# Altium PCB M3 ICE.PcbDoc (part 1 of 2)
Units mil, origin at the board's own origin, x right, y up, seen from the top; angles counter-clockwise.
Board outline 4160 x 4350 mil, 4 copper layers (Top Layer, Mid-Layer 1, Mid-Layer 2, Bottom Layer); 218 components, 222 nets, 884 pads, 88 vias.
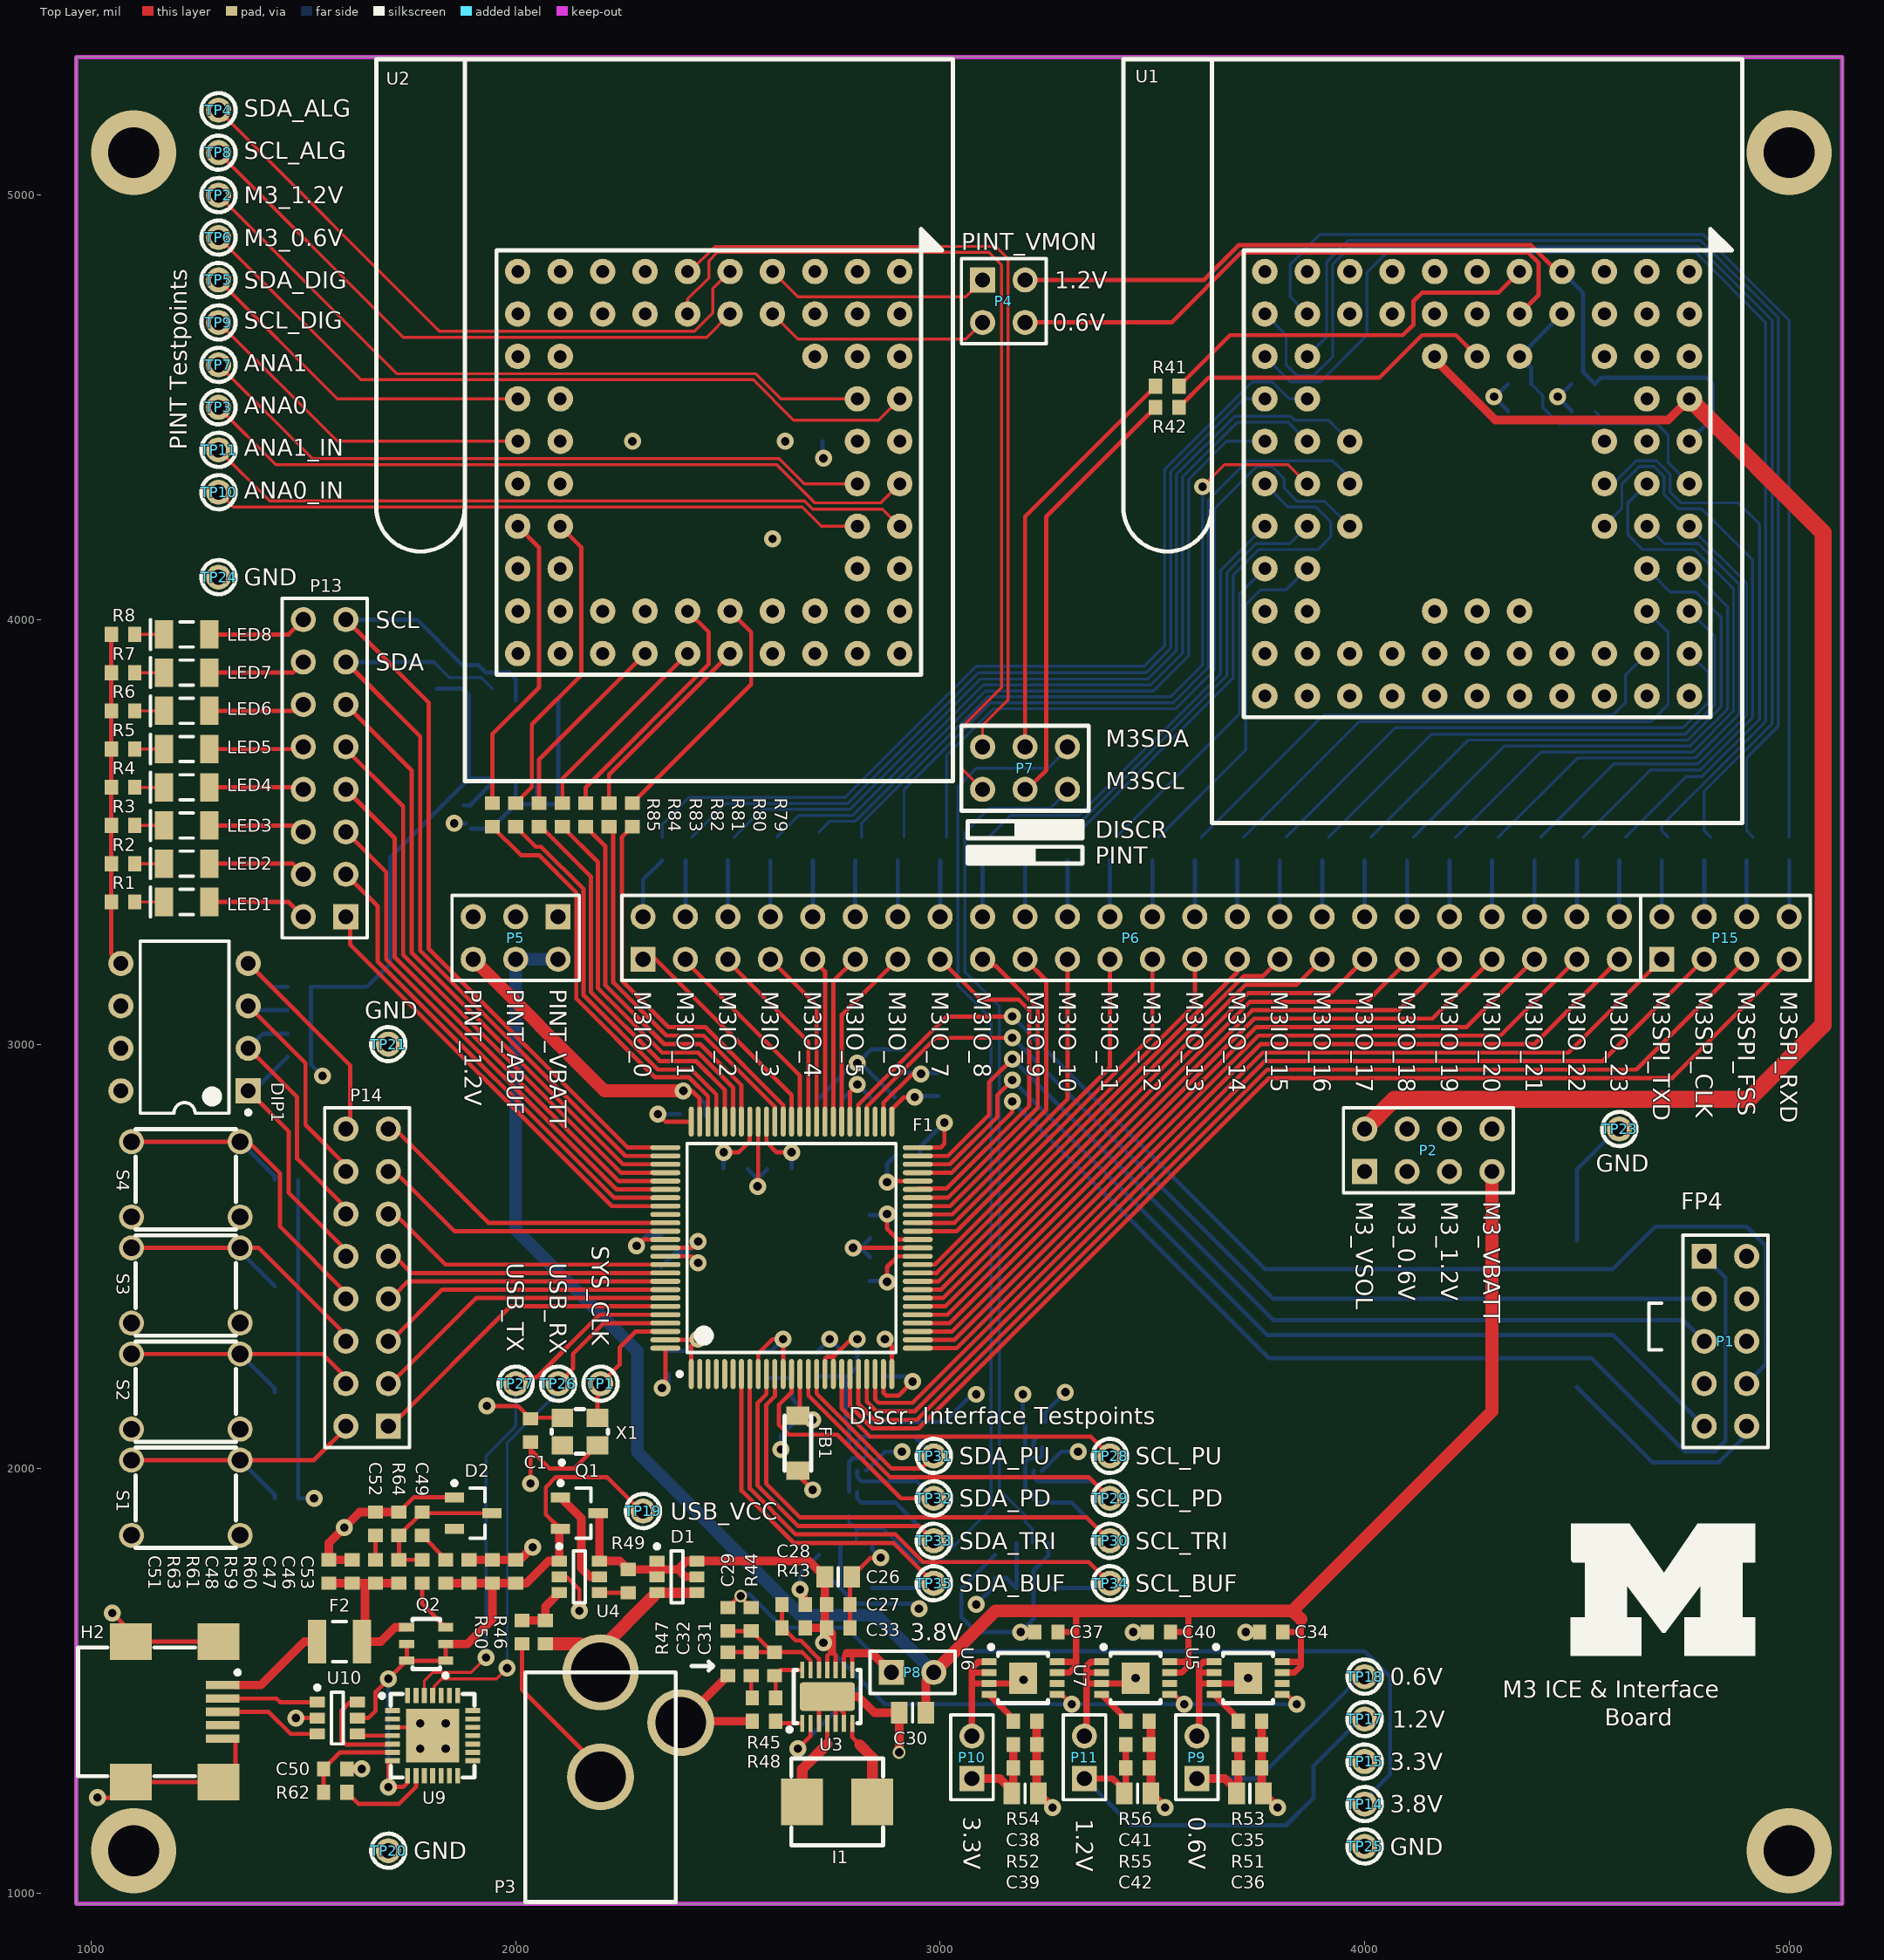
[diagram p0: Top Layer view]
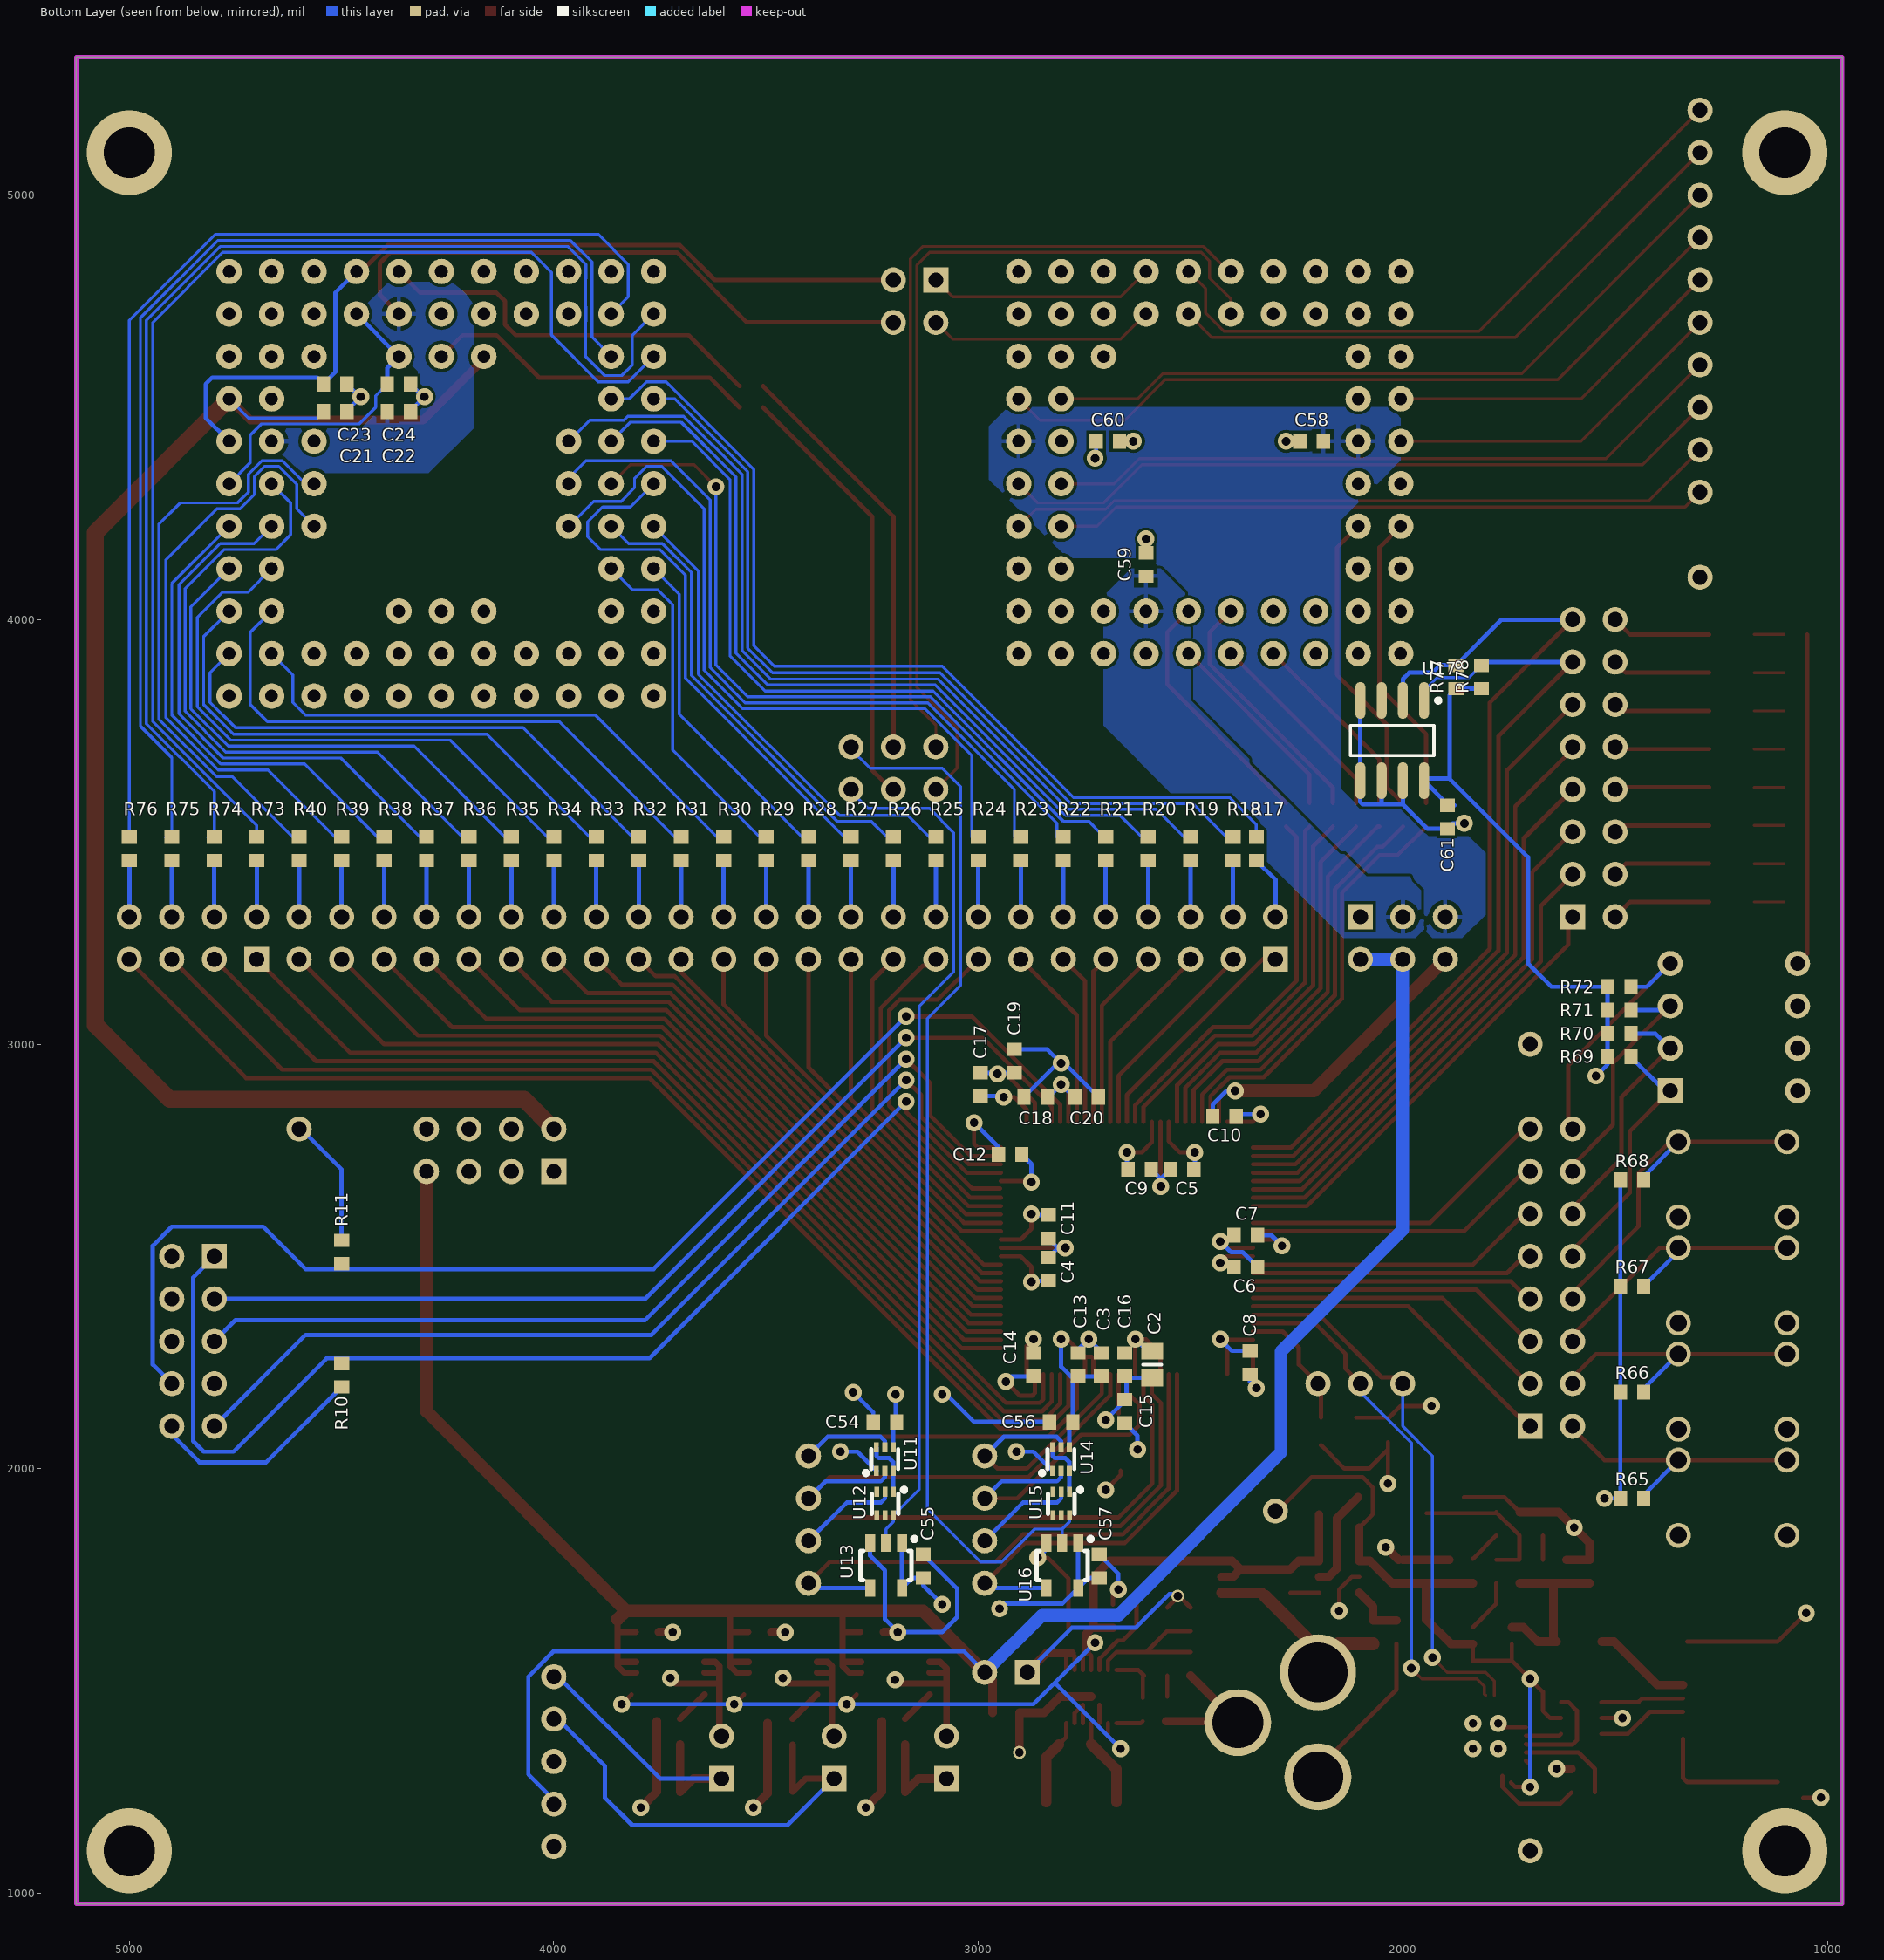
[diagram p1: Bottom Layer view, seen from below]
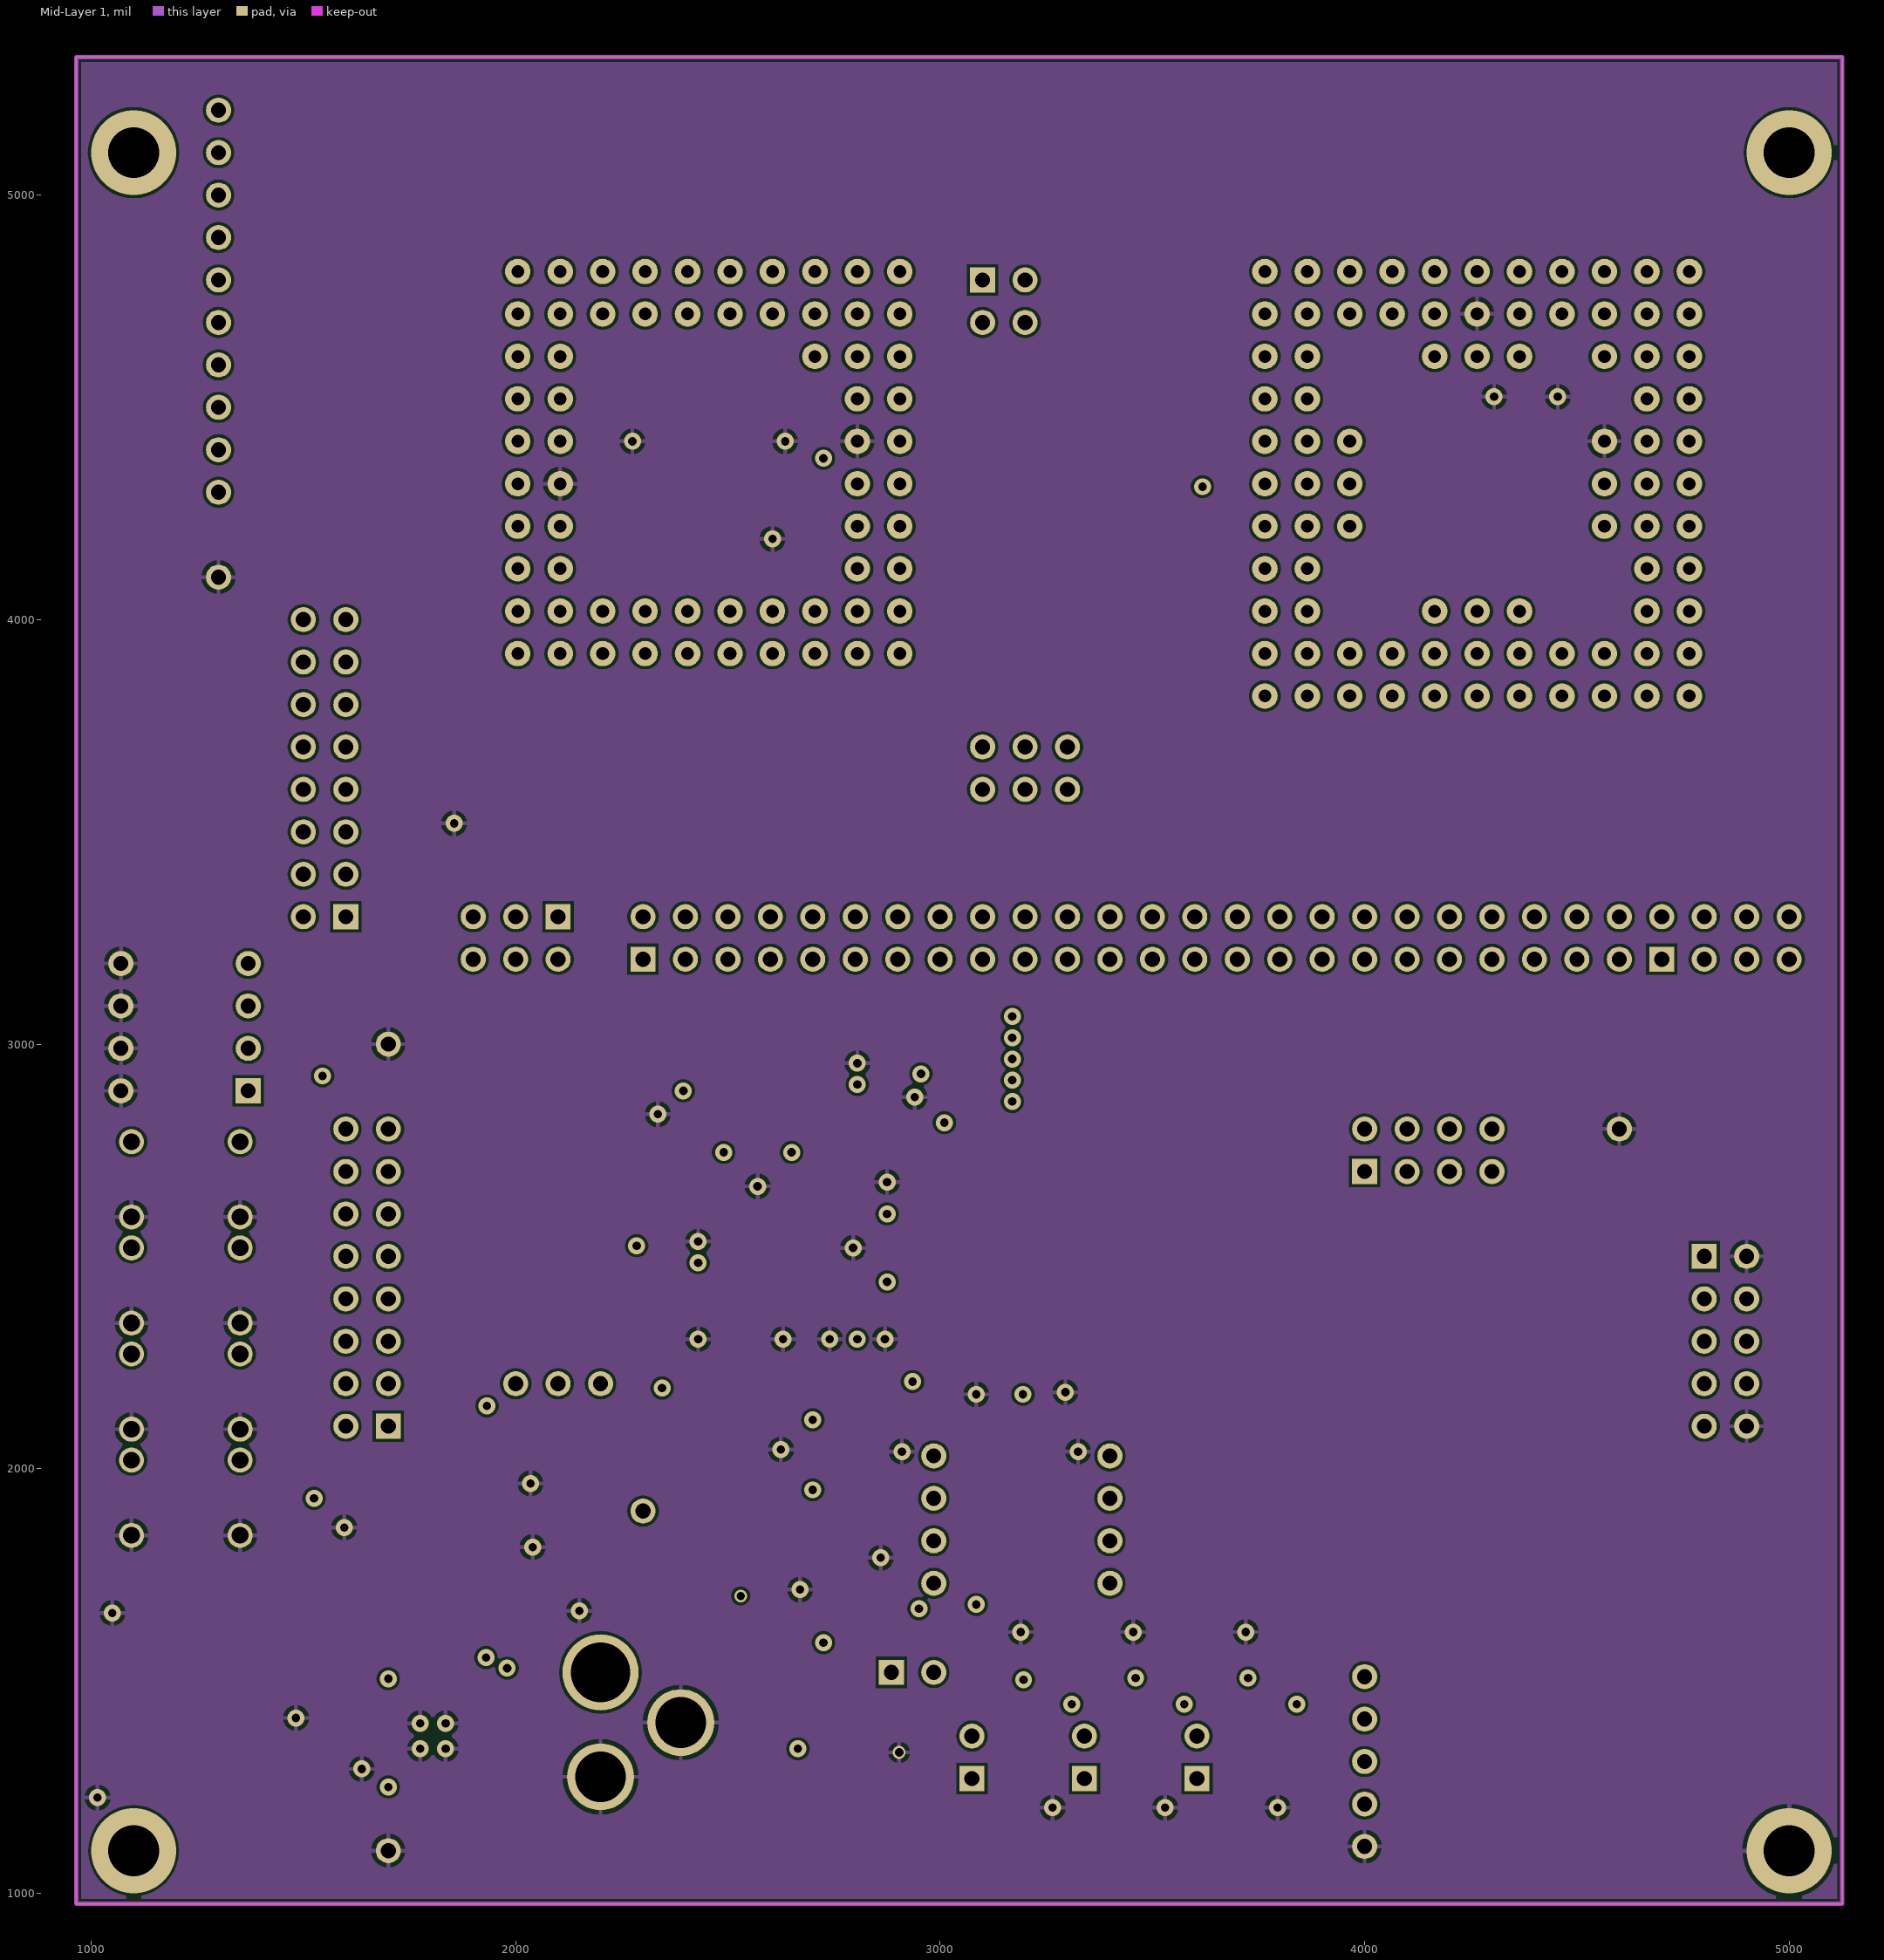
[diagram p2: Mid-Layer 1]
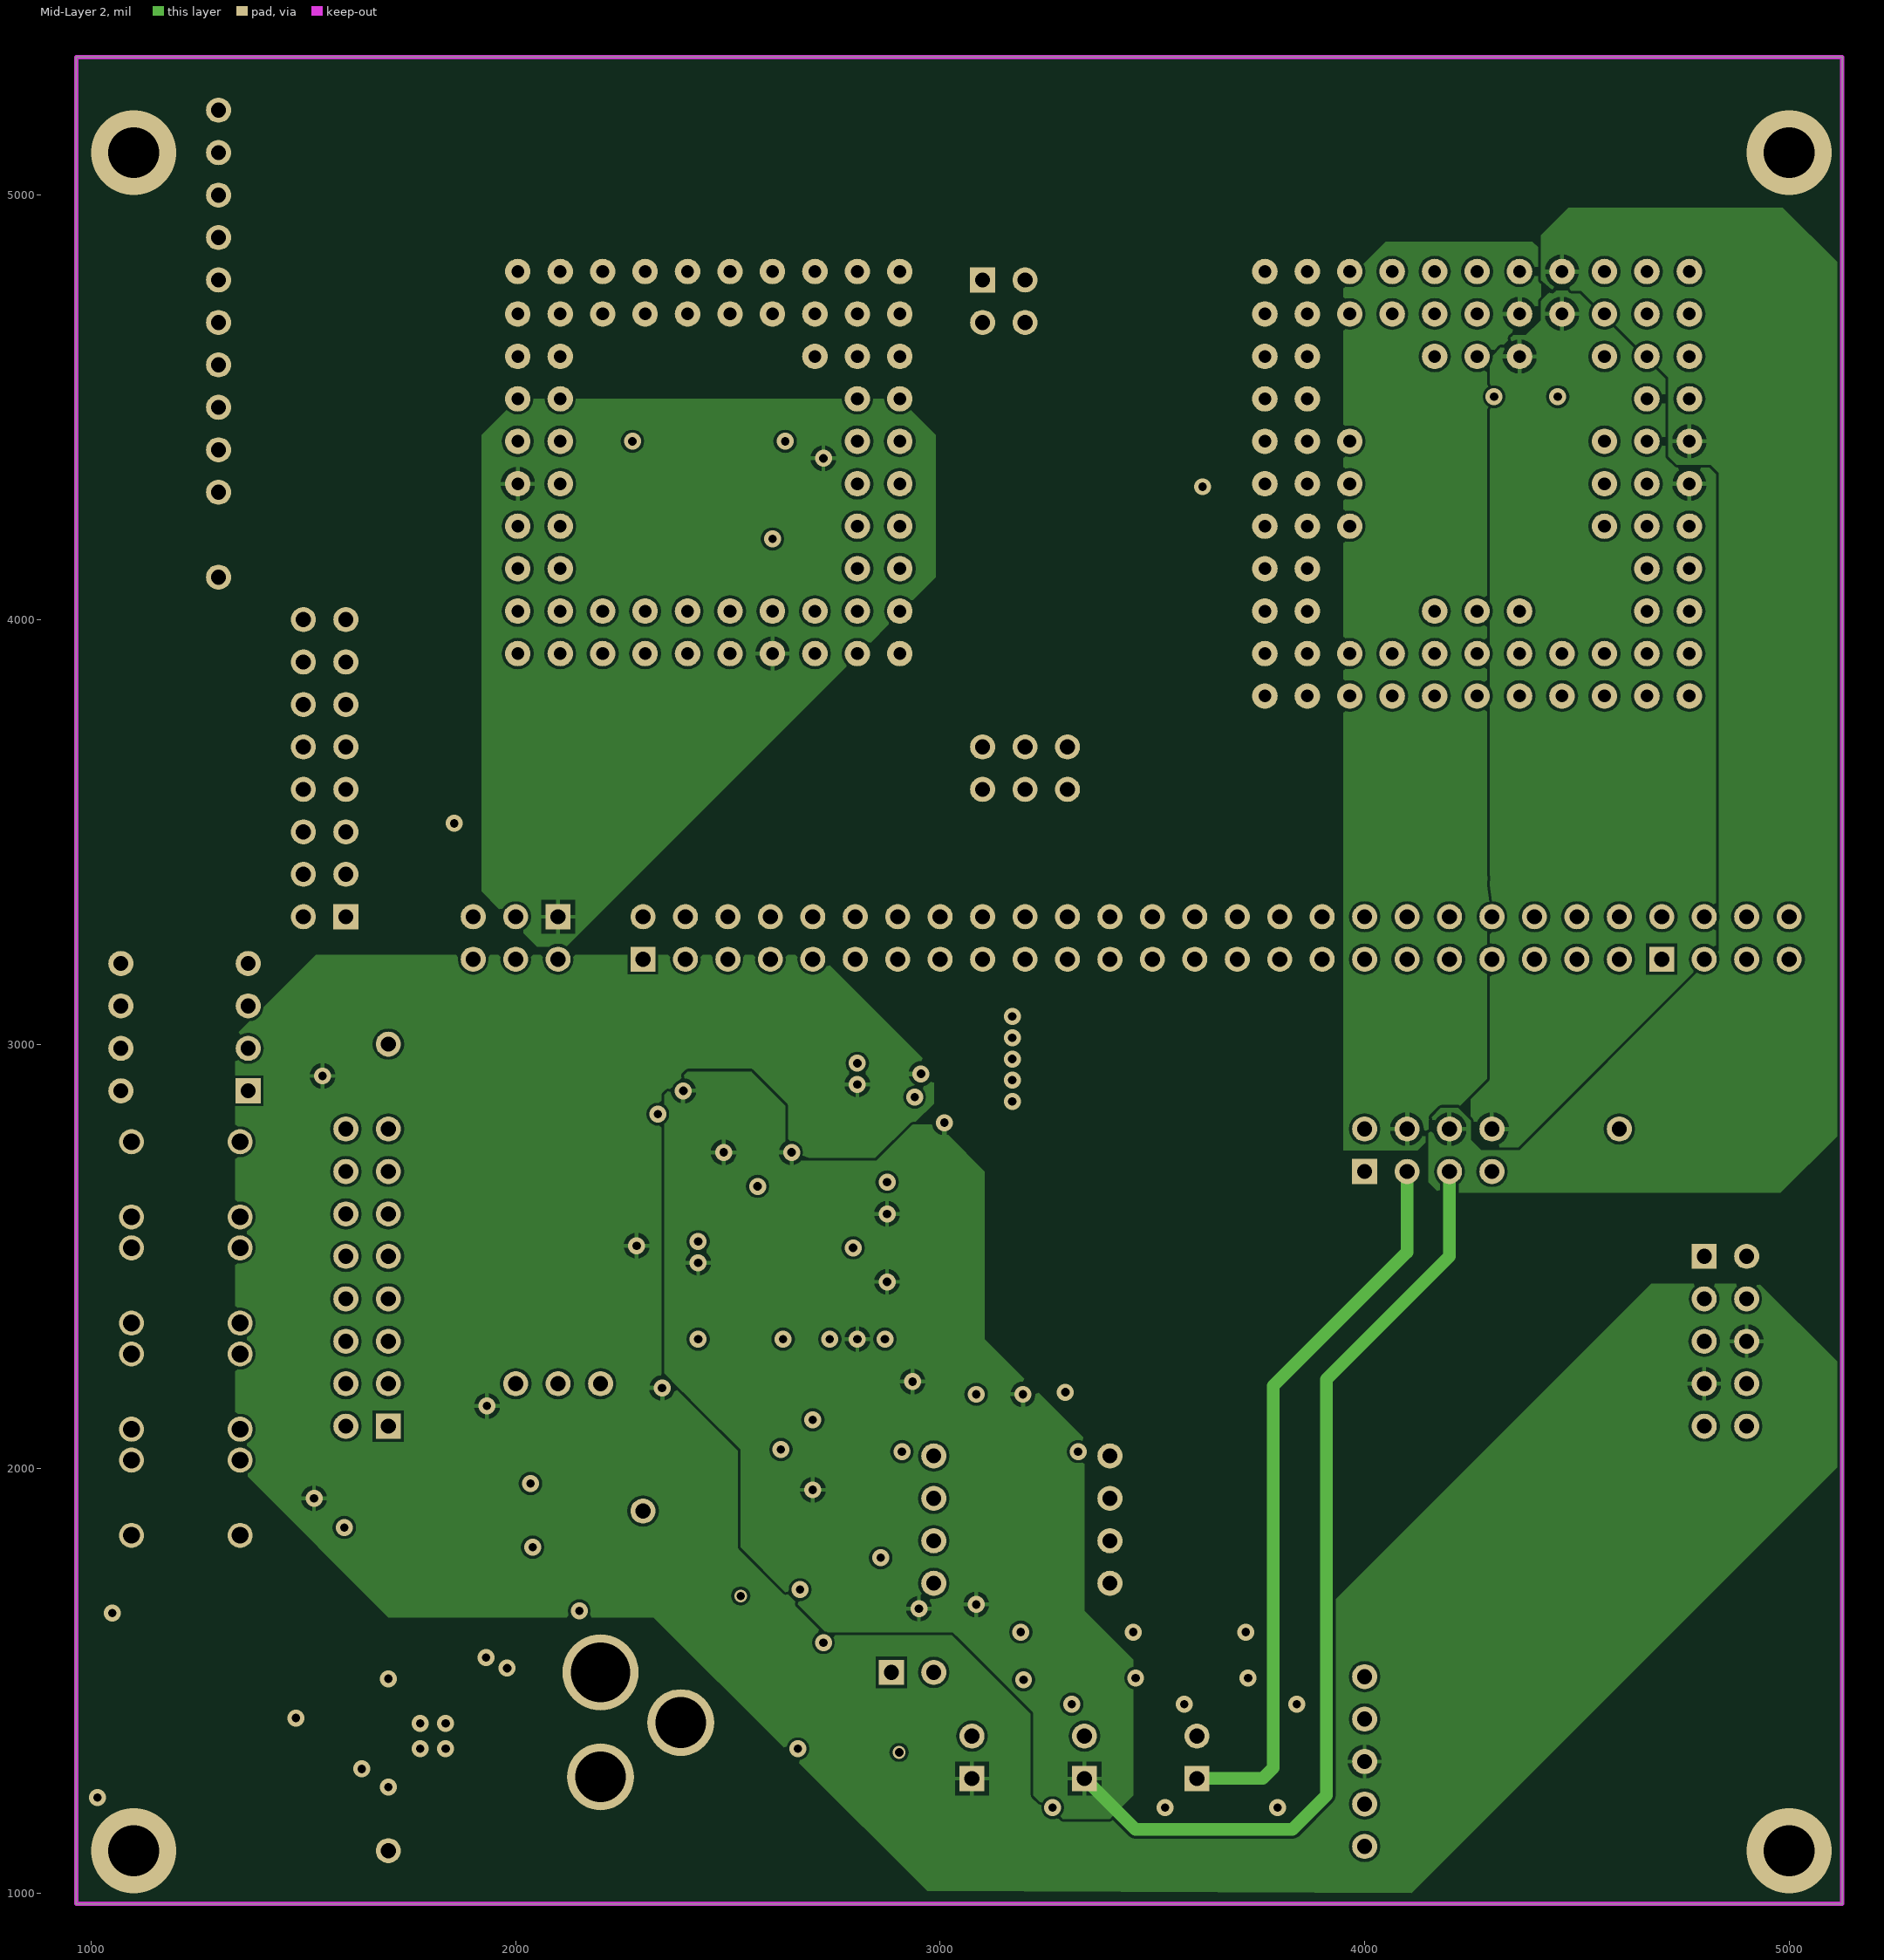
[diagram p3: Mid-Layer 2]

## Layer stack, top to bottom
Top Layer: signal copper 1.4
Dielectric: core 12.6, FR-4, Dk 4.8
Mid-Layer 1: signal copper 1.4
Dielectric: prepreg 12.6, FR-4, Dk 4.8
Mid-Layer 2: signal copper 1.4
Dielectric: core 12.6, FR-4, Dk 4.8
Bottom Layer: signal copper 1.4

## Board outline
965,975 965,5325 5125,5325 5125,975

## Design rules (kind name [scope] priority, off if disabled: settings)
Clearance [All] p1: gap=7
ComponentClearance [All] p1 off: gap=10 collisioncheckmode=3 verticalgap=10 showdistances=FALSE
HoleSize [All] p1: absolutevalues=TRUE maxlimit=1000 minlimit=1 maxpercent=80.000 minpercent=20.000
MinimumSolderMaskSliver [All] p1: minsoldermaskwidth=0
PolygonConnect [All] p1: connectstyle=Relief reliefconductorwidth=10 reliefentries=4 polygonreliefangle="90 Angle" airgapwidth=10
RoutingVias [All] p1: holewidth=20 width=40 viastyle="Through Hole" minholewidth=15 minwidth=30 maxholewidth=28 maxwidth=50
SilkToSilkClearance [All] p1: silktosilkclearance=0
SilkscreenOverComponentPads [All] p1: minsilkscreentomaskgap=0
SolderMaskExpansion [All] p1: expansion=4
Width [All] p1: maxlimit=50 minlimit=7 preferedwidth=8
23 further rules are at their usual default settings.

## Classes and differential pairs
component class USB_to_UART: C46 C47 C48 C49 C50 C51 C52 C53 D2 F2 H2 Q2 R59 R60 R61 R62 R63 R64 TP26 TP27 U9 U10
component class Power: C26 C27 C28 C29 C30 C31 C32 C33 C34 C35 C36 C37 C38 C39 C40 C41 C42 D1 I1 P3 P8 P9 P10 P11 Q1 R43 R44 R45 R46 R47 R48 R49 R50 R51 R52 R53 R54 R55 R56 TP14 TP15 TP17 TP18 TP19 TP20 TP21 TP23 TP24 TP25 U3 U4 U5 U6 U7
component class M3_Discrete_Interface: C54 C55 C56 C57 TP28 TP29 TP30 TP31 TP32 TP33 TP34 TP35 U11 U12 U13 U14 U15 U16
component class M3_Chip: C21 C22 C23 C24 C58 C59 C60 P2 P4 P5 P6 P7 P15 R17 R18 R19 R20 R21 R22 R23 R24 R25 R26 R27 R28 R29 R30 R31 R32 R33 R34 R35 R36 R37 R38 R39 R40 R41 R42 R73 R74 R75 R76 R79 R80 R81 R82 R83 R84 R85 TP2 TP3 TP4 TP5 TP6 TP7 TP8 TP9 TP10 TP11 U1 U2
component class FPGA_misc: C1 C2 C3 C4 C5 C6 C7 C8 C9 C10 C11 C12 C13 C14 C15 C16 C17 C18 C19 C20 FB1 P1 R10 R11 TP1 X1
component class FPGA_IO: C61 DIP1 F1 LED1 LED2 LED3 LED4 LED5 LED6 LED7 LED8 P13 P14 R1 R2 R3 R4 R5 R6 R7 R8 R65 R66 R67 R68 R69 R70 R71 R72 R77 R78 S1 S2 S3 S4 U17

## Components (designator, comment, footprint, x,y, rotation, side; value= is the part's Value field where it differs from the comment)
C1 "Cap Semi" 1608[0603] 2035,2090 r90 top
C2 "Cap Chip" 0805 2590,2245 r270 bottom
C3 "Cap Semi" 1608[0603] 2710,2245 r270 bottom
C4 "Cap Semi" 1608[0603] 2835,2470 r270 bottom
C5 "Cap Semi" 1608[0603] 2520,2705 r180 bottom
C6 "Cap Semi" 1608[0603] 2370,2475 r0 bottom
C7 "Cap Semi" 1608[0603] 2370,2550 r180 bottom
C8 "Cap Semi" 1608[0603] 2360,2250 r270 bottom
C9 "Cap Semi" 1608[0603] 2620,2705 r0 bottom
C10 "Cap Semi" 1608[0603] 2420,2830 r0 bottom
C11 "Cap Semi" 1608[0603] 2835,2570 r90 bottom
C12 "Cap Semi" 1608[0603] 2925,2740 r0 bottom
C13 "Cap Semi" 1608[0603] 2765,2245 r270 bottom
C14 "Cap Semi" 1608[0603] 2870,2245 r270 bottom
C15 "Cap Semi" 1608[0603] 2655,2135 r90 bottom
C16 "Cap Semi" 1608[0603] 2655,2245 r270 bottom
C17 "Cap Semi" 1608[0603] 2995,2905 r90 bottom
C18 "Cap Semi" 1608[0603] 2865,2875 r180 bottom
C19 "Cap Semi" 1608[0603] 2915,2960 r270 bottom
C20 "Cap Semi" 1608[0603] 2745,2875 r0 bottom
C21 "Cap Semi" 1608[0603] 4515,4490 r0 bottom
C22 "Cap Semi" 1608[0603] 4365,4490 r0 bottom
C23 "Cap Semi" 1608[0603] 4515,4555 r0 bottom
C24 "Cap Semi" 1608[0603] 4365,4555 r0 bottom
C26 "Cap Chip" 0805 2760,1745 r180 top
C27 "Cap Semi" 1608[0603] 2760,1680 r180 top
C28 "Cap Semi" 1608[0603] 2655,1680 r0 top
C29 "Cap Semi" 1608[0603] 2500,1645 r90 top
C30 "Cap Chip" 0805 2935,1425 r0 top
C31 "Cap Semi" 1608[0603] 2610,1540 r270 top
C32 "Cap Semi" 1608[0603] 2555,1540 r270 top
C33 "Cap Semi" 1608[0603] 2760,1625 r180 top
C34 "Cap Semi" 1608[0603] 3780,1615 r0 top
C35 "Cap Semi" 1608[0603] 3730,1350 r180 top
C36 "Cap Chip" 0805 3730,1235 r180 top
C37 "Cap Semi" 1608[0603] 3250,1615 r0 top
C38 "Cap Semi" 1608[0603] 3200,1350 r180 top
C39 "Cap Chip" 0805 3200,1235 r180 top
C40 "Cap Semi" 1608[0603] 3515,1615 r0 top
C41 "Cap Semi" 1608[0603] 3465,1350 r180 top
C42 "Cap Chip" 0805 3465,1235 r180 top
C46 "Cap Semi" 1608[0603] 1945,1757.56 r270 top
C47 "Cap Semi" 1608[0603] 1890,1757.56 r270 top
C48 "Cap Semi" 1608[0603] 1725,1757.56 r270 top
C49 "Cap Semi" 1608[0603] 1780,1870 r90 top
C50 "Cap Semi" 1608[0603] 1575,1292.56 r180 top
C51 "Cap Semi" 1608[0603] 1560,1757.56 r270 top
C52 "Cap Semi" 1608[0603] 1670,1870 r270 top
C53 "Cap Semi" 1608[0603] 2000,1757.56 r270 top
C54 "Cap Semi" 1608[0603] 3220,2110 r180 bottom
C55 "Cap Semi" 1608[0603] 3130,1770 r270 bottom
C56 "Cap Semi" 1608[0603] 2805,2110 r180 bottom
C57 "Cap Semi" 1608[0603] 2715,1770 r270 bottom
C58 "Cap Semi" 1608[0603] 2215,4420 r180 bottom
C59 "Cap Semi" 1608[0603] 2605,4130 r270 bottom
C60 "Cap Semi" 1608[0603] 2695,4420 r0 bottom
C61 "Cap Semi" 1608[0603] 1895,3535 r90 bottom
D1 "ZHCS2000TA" SOT23-6_L 2380,1745 r0 top
D2 "BAT54" SOT-23_N 1900,1895 r0 top
DIP1 "ADE0404" DIP-8 1220,3040 r180 top
F1 "AGLN250V2-VQG100" VQ100_N 2650,2520 r90 top
F2 "MICROSMD050F-2" 1210 1585,1592.56 r0 top
FB1 "HF30ACC321611-T" Ferrite_Bead_3.2mm_1.6mm 2665,1995 r90 top
H2 "UX60-MB-5ST" "USB Mini-B" 1310,1490 r270 top
I1 "IHLP-2020BZ-01" INDUCTOR_5.49mm_5.18mm 2675,1215 r0 top
LED1 "LED 1206" 1206_LED 1225,3335 r180 top
LED2 "LED 1206" 1206_LED 1225,3425 r180 top
LED3 "LED 1206" 1206_LED 1225,3515 r180 top
LED4 "LED 1206" 1206_LED 1225,3605 r180 top
LED5 "LED 1206" 1206_LED 1225,3695 r180 top
LED6 "LED 1206" 1206_LED 1225,3785 r180 top
LED7 "LED 1206" 1206_LED 1225,3875 r180 top
LED8 "LED 1206" 1206_LED 1225,3965 r180 top
P1 "Header 5X2" HDR2X5 4800,2500 r270 top
P2 "Header 4X2" HDR2X4 4000,2700 r0 top
P3 "RAPC722X" RAPC722X 2200,1520 r0 top
P4 "Header 2X2" HDR2X2 3100,4800 r270 top
P5 "Header 3X2" HDR2X3 2100,3300 r180 top
P6 "Header 24X2" HDR2X24 2300,3200 r0 top
P7 "2P2T .1\" Mux" HDR3x2 3100,3700 r0 top
P8 "Header 2" HDR1X2 2885,1520 r0 top
P9 "Header 2" HDR1X2 3605,1270 r90 top
P10 "Header 2" HDR1X2 3075,1270 r90 top
P11 "Header 2" HDR1X2 3340,1270 r90 top
P13 "Header 8X2" HDR2X8 1600,3300 r90 top
P14 "Header 8X2" HDR2X8 1700,2100 r90 top
P15 "Header 4X2" HDR2X4 4700,3200 r0 top
Q1 "SI2303BDS" SOT-23_N 2150,1895 r0 top
Q2 "SI3477" TSOP-6 1835,1547.56 r90 top
R1 "Res Chip" 0603 1075,3335 r0 top
R2 "Res Chip" 0603 1075,3425 r0 top
R3 "Res Chip" 0603 1075,3515 r0 top
R4 "Res Chip" 0603 1075,3605 r0 top
R5 "Res Chip" 0603 1075,3695 r0 top
R6 "Res Chip" 0603 1075,3785 r0 top
R7 "Res Chip" 0603 1075,3875 r0 top
R8 "Res Chip" 0603 1075,3965 r0 top
R10 "Res Chip" 0603 4500,2220 r270 bottom
R11 "Res Chip" 0603 4500,2510 r90 bottom
R17 "Res Chip" 0603 2345,3460 r270 bottom
R18 "Res Chip" 0603 2400,3460 r270 bottom
R19 "Res Chip" 0603 2500,3460 r270 bottom
R20 "Res Chip" 0603 2600,3460 r270 bottom
R21 "Res Chip" 0603 2700,3460 r270 bottom
R22 "Res Chip" 0603 2800,3460 r270 bottom
R23 "Res Chip" 0603 2900,3460 r270 bottom
R24 "Res Chip" 0603 3000,3460 r270 bottom
R25 "Res Chip" 0603 3100,3460 r270 bottom
R26 "Res Chip" 0603 3200,3460 r270 bottom
R27 "Res Chip" 0603 3300,3460 r270 bottom
R28 "Res Chip" 0603 3400,3460 r270 bottom
R29 "Res Chip" 0603 3500,3460 r270 bottom
R30 "Res Chip" 0603 3600,3460 r270 bottom
R31 "Res Chip" 0603 3700,3460 r270 bottom
R32 "Res Chip" 0603 3800,3460 r270 bottom
R33 "Res Chip" 0603 3900,3460 r270 bottom
R34 "Res Chip" 0603 4000,3460 r270 bottom
R35 "Res Chip" 0603 4100,3460 r270 bottom
R36 "Res Chip" 0603 4200,3460 r270 bottom
R37 "Res Chip" 0603 4300,3460 r270 bottom
R38 "Res Chip" 0603 4400,3460 r270 bottom
R39 "Res Chip" 0603 4500,3460 r270 bottom
R40 "Res Chip" 0603 4600,3460 r270 bottom
R41 "Res Chip" 0603 3535,4550 r180 top
R42 "Res Chip" 0603 3535,4500 r180 top
R43 "Res Chip" 0603 2655,1625 r0 top
R44 "Res Chip" 0603 2555,1645 r90 top
R45 "Res Chip" 0603 2585,1460 r0 top
R46 "Res Chip" 0603 2070,1615 r270 top
R47 "Res Chip" 0603 2500,1540 r270 top
R48 "Res Chip" 0603 2585,1405 r0 top
R49 "Res Chip" 0603 2265,1735 r270 top
R50 "Res Chip" 0603 2015,1615 r90 top
R51 "Res Chip" 0603 3730,1295 r180 top
R52 "Res Chip" 0603 3200,1295 r180 top
R53 "Res Chip" 0603 3730,1405 r180 top
R54 "Res Chip" 0603 3200,1405 r180 top
R55 "Res Chip" 0603 3465,1295 r180 top
R56 "Res Chip" 0603 3465,1405 r180 top
R59 "Res Chip" 0603 1780,1757.56 r270 top
R60 "Res Chip" 0603 1835,1757.56 r270 top
R61 "Res Chip" 0603 1670,1757.56 r270 top
R62 "Res Chip" 0603 1575,1237.56 r180 top
R63 "Res Chip" 0603 1615,1757.56 r270 top
R64 "Res Chip" 0603 1725,1870 r270 top
R65 "Res Chip" 0603 1460,1930 r180 bottom
R66 "Res Chip" 0603 1460,2180 r180 bottom
R67 "Res Chip" 0603 1460,2430 r180 bottom
R68 "Res Chip" 0603 1460,2680 r180 bottom
R69 "Res Chip" 0603 1490,2970 r180 bottom
R70 "Res Chip" 0603 1490,3025 r180 bottom
R71 "Res Chip" 0603 1490,3080 r180 bottom
R72 "Res Chip" 0603 1490,3135 r180 bottom
R73 "Res Chip" 0603 4700,3460 r270 bottom
R74 "Res Chip" 0603 4800,3460 r270 bottom
R75 "Res Chip" 0603 4900,3460 r270 bottom
R76 "Res Chip" 0603 5000,3460 r270 bottom
R77 "Res Chip" 0603 1875,3865 r90 bottom
R78 "Res Chip" 0603 1815,3865 r90 bottom
R79 "Res Chip" 0603 2275,3540 r90 top
R80 "Res Chip" 0603 2220,3540 r90 top
R81 "Res Chip" 0603 2165,3540 r90 top
R82 "Res Chip" 0603 2110,3540 r90 top
R83 "Res Chip" 0603 2055,3540 r90 top
R84 "Res Chip" 0603 2000,3540 r90 top
R85 "Res Chip" 0603 1945,3540 r90 top
S1 "EVQ-PAE04M" EVQPA 1095,2020 r270 top
S2 "EVQ-PAE04M" EVQPA 1095,2270 r270 top
S3 "EVQ-PAE04M" EVQPA 1095,2520 r270 top
S4 "EVQ-PAE04M" EVQPA 1095,2770 r270 top
TP1 "TP" TP 2200,2200 r0 top
TP2 "TP" TP 1300,5000 r0 top
TP3 "TP" TP 1300,4500 r90 top
TP4 "TP" TP 1300,5200 r0 top
TP5 "TP" TP 1300,4800 r0 top
TP6 "TP" TP 1300,4900 r90 top
TP7 "TP" TP 1300,4600 r90 top
TP8 "TP" TP 1300,5100 r0 top
TP9 "TP" TP 1300,4700 r0 top
TP10 "TP" TP 1300,4300 r90 top
TP11 "TP" TP 1300,4400 r90 top
TP14 "TP" TP 4000,1210 r180 top
TP15 "TP" TP 4000,1310 r180 top
TP17 "TP" TP 4000,1410 r180 top
TP18 "TP" TP 4000,1510 r180 top
TP19 "TP" TP 2300,1900 r90 top
TP20 "TP" TP 1700,1100 r90 top
TP21 "TP" TP 1700,3000 r90 top
TP23 "TP" TP 4600,2800 r90 top
TP24 "TP" TP 1300,4100 r90 top
TP25 "TP" TP 4000,1110 r90 top
TP26 "TP" TP 2100,2200 r90 top
TP27 "TP" TP 2000,2200 r90 top
TP28 "TP" TP 3400,2030 r0 top
TP29 "TP" TP 3400,1930 r0 top
TP30 "TP" TP 3400,1830 r0 top
TP31 "TP" TP 2985,2030 r0 top
TP32 "TP" TP 2985,1930 r0 top
TP33 "TP" TP 2985,1830 r0 top
TP34 "TP" TP 3400,1730 r0 top
TP35 "TP" TP 2985,1730 r0 top
U1 "M3" CPGA-84 3765,4820 r270 top
U2 "PINT" CPGA-65 2005,4820 r270 top
U3 "LTC3533" 14-WFDFN 2675,1400 r90 top
U4 "LTC4412" SOT23-6_L 2150,1745 r0 top
U5 "LT3080" MSOP-8 3645,1545 r0 top
U6 "LT3080" MSOP-8 3115,1545 r0 top
U7 "LT3080" MSOP-8 3380,1545 r0 top
U9 "CP2102" QFN-28 1710,1430 r0 top
U10 "USBLC6-2" SOT23-6_L 1580,1412.56 r0 top
U11 "SI1035X" SC-89-6 3240,1995 r180 bottom
U12 "SI1035X" SC-89-6 3200,1945 r0 bottom
U13 "SN74AUP1G126" SOT-753 3180,1825 r0 bottom
U14 "SI1035X" SC-89-6 2825,1995 r180 bottom
U15 "SI1035X" SC-89-6 2785,1945 r0 bottom
U16 "SN74AUP1G126" SOT-753 2765,1825 r0 bottom
U17 "LM75B" SO8 2025,3715 r270 bottom
X1 "ASE-20.000MHZ-LC-T" CRYSTAL_3.2mm_2.5mm 2110,2055 r0 top

## Footprints (in the part's own frame and the unit in brackets; to place one, negate y for a bottom-side part, rotate by r counter-clockwise, add the part's x,y. Pads: shape width x height; smd on the part's side, far side on the other; paste and mask are expansions set on the pad)
14-WFDFN [mm]
  rect 1x0.25 smd: 1(0,0) 2(0,-0.5) 3(0,-1) 4(0,-1.5) 5(0,-2) 6(0,-2.5) 7(0,-3) 8(3.2,-3) 9(3.2,-2.5) 10(3.2,-2) 11(3.2,-1.5) 12(3.2,-1) 13(3.2,-0.5) 14(3.2,0)
  rrect20% 1.7x3.3 smd: 15(1.6,-1.5)
  silkscreen extent -0.5,-3.5 3.2,0.89
0603 [mm] "Chip Capacitor, Body 1.6x0.8mm, IPC High Density"
  rect 0.8x0.9 smd: 1(-0.7,0) 2(0.7,0)
  body extent -0.87,-0.48 0.87,0.48, height 1.3
0805 [mm] "Chip Resistor, Body 2.0x1.2mm, IPC High Density"
  rect 1x1.3 smd: 1(-0.8,0) 2(0.8,0)
  silkscreen extent 0,-0.55 0,0.55, body extent -1.07,-0.7 1.07,0.7, height 0.7
1206_LED [mm] "Chip Capacitor, Body 3.2x1.6mm, IPC High Density"
  rect 1.1x1.7 smd: 1(-1.35,0) 2(1.35,0)
  silkscreen extent -0.4,-0.89 2.16,0.89, body extent -1.7,-0.9 1.7,0.9, height 1.3
1210 [mm] "Chip Resistor, Body 3.2x2.5mm, IPC High Density"
  rect 1.1x2.6 smd: 1(-1.35,0) 2(1.35,0)
  silkscreen extent -0.4,-1.2 0.4,1.2, body extent -1.68,-1.32 1.68,1.32, height 0.9
1608[0603] [mm] "Chip Capacitor, Body 1.6x0.8mm, IPC High Density"
  rect 0.8x0.9 smd: 1(-0.7,0) 2(0.7,0)
  body extent -0.87,-0.48 0.87,0.48, height 1.3
CPGA-65 [mil]
  round 60 hole 30: A1(0,900) A2(100,900) A3(200,900) A4(300,900) A5(400,900) A6(500,900) A7(600,900) A8(700,900) A9(800,900) A10(900,900) B1(0,800) B2(100,800) B3(200,800) B4(300,800) B5(400,800) B6(500,800) B7(600,800) B8(700,800) B9(800,800) B10(900,800) C1(0,700) C2(100,700) C3(200,700) C9(800,700) C10(900,700) D1(0,600) D2(100,600) D9(800,600) D10(900,600) E1(0,500) E2(100,500) E9(800,500) E10(900,500) F1(0,400) F2(100,400) F9(800,400) F10(900,400) G1(0,300) G2(100,300) G9(800,300) G10(900,300) H1(0,200) H2(100,200) H9(800,200) H10(900,200) J1(0,100) J2(100,100) J3(200,100) J4(300,100) J5(400,100) J6(500,100) J7(600,100) J8(700,100) J9(800,100) J10(900,100) K1(0,0) K2(100,0) K3(200,0) K4(300,0) K5(400,0) K6(500,0) K7(600,0) K8(700,0) K9(800,0) K10(900,0)
  silkscreen extent -500,-333 1201,1025
CPGA-84 [mil]
  round 60 hole 30: A1(0,1000) A2(100,1000) A3(200,1000) A4(300,1000) A5(400,1000) A6(500,1000) A7(600,1000) A8(700,1000) A9(800,1000) A10(900,1000) A11(1000,1000) B1(0,900) B2(100,900) B3(200,900) B4(300,900) B5(400,900) B6(500,900) B7(600,900) B8(700,900) B9(800,900) B10(900,900) B11(1000,900) C1(0,800) C2(100,800) C3(200,800) C5(400,800) C6(500,800) C7(600,800) C10(900,800) C11(1000,800) D1(0,700) D2(100,700) D10(900,700) D11(1000,700) E1(0,600) E2(100,600) E3(200,600) E9(800,600) E10(900,600) E11(1000,600) F1(0,500) F2(100,500) F3(200,500) F9(800,500) F10(900,500) F11(1000,500) G1(0,400) G2(100,400) G3(200,400) G9(800,400) G10(900,400) G11(1000,400) H1(0,300) H2(100,300) H10(900,300) H11(1000,300) J1(0,200) J2(100,200) J5(400,200) J6(500,200) J7(600,200) J10(900,200) J11(1000,200) K1(0,100) K2(100,100) K3(200,100) K4(300,100) K5(400,100) K6(500,100) K7(600,100) K8(700,100) K9(800,100) K10(900,100) K11(1000,100) L1(0,0) L2(100,0) L3(200,0) L4(300,0) L5(400,0) L6(500,0) L7(600,0) L8(700,0) L9(800,0) L10(900,0) L11(1000,0)
  silkscreen extent -500,-333 1299,1125
CRYSTAL_3.2mm_2.5mm [mm]
  rect 1.3x1.1 smd: 1(0,0) 2(2.1,0) 3(2.1,1.65) 4(0,1.65)
  silkscreen extent -0.64,-1.16 2.73,2.16
DIP-8 [mm] "DIP; 8 Leads; Row Spacing 7.62 mm; Pitch 2.54 mm"
  rect 1.5x1.5 hole 0.9: 1(-3.81,3.81)
  round 1.5 hole 0.9: 2(-3.81,1.27) 3(-3.81,-1.27) 4(-3.81,-3.81) 5(3.81,-3.81) 6(3.81,-1.27) 7(3.81,1.27) 8(3.81,3.81)
  silkscreen extent -3.94,-5.15 2.65,5.23, body extent -3.6,-5.15 3.6,5.15, height 5.08
EVQPA [mm]
  round 1.5 hole 1: 1(0,6.5) 1(0,0) 2(4.5,6.5) 2(4.5,0)
  silkscreen extent -0.75,0.25 5.25,6.25
Ferrite_Bead_3.2mm_1.6mm [mm]
  rect 1.1x1.4 smd: 1(0,0) 2(3.3,0)
  silkscreen extent 0,-0.8 3.3,0.8
HDR1X2 [mm] "Connector; Header; 2 Position"
  rect 1.5x1.5 hole 0.9: 1(0,0)
  round 1.5 hole 0.9: 2(2.54,0)
  silkscreen extent -1.27,-1.27 3.81,1.27
HDR2X2 [mm] "Connector; Header; 2x2 Position"
  rect 1.5x1.5 hole 0.9: 1(0,0)
  round 1.5 hole 0.9: 2(0,2.54) 3(2.54,0) 4(2.54,2.54)
  silkscreen extent -1.27,-1.27 3.81,3.81
HDR2X3 [mm] "Connector; Header; 3x2 Position"
  rect 1.5x1.5 hole 0.9: 1(0,0)
  round 1.5 hole 0.9: 2(0,2.54) 3(2.54,0) 4(2.54,2.54) 5(5.08,0) 6(5.08,2.54)
  silkscreen extent -1.27,-1.27 6.35,3.81
HDR2X4 [mm] "Connector; Header; 4x2 Position"
  rect 1.5x1.5 hole 0.9: 1(0,0)
  round 1.5 hole 0.9: 2(0,2.54) 3(2.54,0) 4(2.54,2.54) 5(5.08,0) 6(5.08,2.54) 7(7.62,0) 8(7.62,2.54)
  silkscreen extent -1.27,-1.27 8.89,3.81
HDR2X5 [mm] "Connector; Header; 5x2 Position"
  rect 1.5x1.5 hole 0.9: 1(0,0)
  round 1.5 hole 0.9: 2(0,2.54) 3(2.54,0) 4(2.54,2.54) 5(5.08,0) 6(5.08,2.54) 7(7.62,0) 8(7.62,2.54) 9(10.16,0) 10(10.16,2.54)
  silkscreen extent -1.27,-1.27 11.43,3.81
HDR2X8 [mm] "Connector; Header; 8x2 Position"
  rect 1.5x1.5 hole 0.9: 1(0,0)
  round 1.5 hole 0.9: 2(0,2.54) 3(2.54,0) 4(2.54,2.54) 5(5.08,0) 6(5.08,2.54) 7(7.62,0) 8(7.62,2.54) 9(10.16,0) 10(10.16,2.54) 11(12.7,0) 12(12.7,2.54) 13(15.24,0) 14(15.24,2.54) 15(17.78,0) 16(17.78,2.54)
  silkscreen extent -1.27,-1.27 19.05,3.81
HDR2X24 [mm] "Connector; Header; 24x2 Position"
  rect 1.5x1.5 hole 0.9: 1(0,0)
  round 1.5 hole 0.9: 2(0,2.54) 3(2.54,0) 4(2.54,2.54) 5(5.08,0) 6(5.08,2.54) 7(7.62,0) 8(7.62,2.54) 9(10.16,0) 10(10.16,2.54) 11(12.7,0) 12(12.7,2.54) 13(15.24,0) 14(15.24,2.54) 15(17.78,0) 16(17.78,2.54) 17(20.32,0) 18(20.32,2.54) 19(22.86,0) 20(22.86,2.54) 21(25.4,0) 22(25.4,2.54) 23(27.94,0) 24(27.94,2.54) 25(30.48,0) 26(30.48,2.54) 27(33.02,0) 28(33.02,2.54) 29(35.56,0) 30(35.56,2.54) 31(38.1,0) 32(38.1,2.54) 33(40.64,0) 34(40.64,2.54) 35(43.18,0) 36(43.18,2.54) 37(45.72,0) 38(45.72,2.54) 39(48.26,0) 40(48.26,2.54) 41(50.8,0) 42(50.8,2.54) 43(53.34,0) 44(53.34,2.54) 45(55.88,0) 46(55.88,2.54) 47(58.42,0) 48(58.42,2.54)
  silkscreen extent -1.27,-1.27 59.69,3.81
HDR3x2 [mm]
  round 1.5 hole 0.9: 1(0,0) 2(2.54,0) 3(5.08,0) 4(0,-2.54) 5(2.54,-2.54) 6(5.08,-2.54)
  silkscreen extent -1.27,-3.81 6.35,1.27
INDUCTOR_5.49mm_5.18mm [mm]
  rect 2.5x2.8 smd: 1(0,0) 2(4.2,0)
  silkscreen extent -0.65,-2.59 4.85,2.59
MSOP-8 [mm]
  rect 0.889x0.42 smd: 1(0,0) 2(0,-0.65) 3(0,-1.3) 4(0,-1.95) 5(4.089,-1.95) 6(4.089,-1.3) 7(4.089,-0.65) 8(4.089,0)
  rect 1.68x1.88 smd: 9(2.045,-0.975)
  silkscreen extent 0,-2.47 3.54,1.01
QFN-28 [mm]
  rect 0.9x0.3 smd: 1(0,0) 2(0,-0.5) 3(0,-1) 4(0,-1.5) 5(0,-2) 6(0,-2.5) 7(0,-3) 15(4.8,-3) 16(4.8,-2.5) 17(4.8,-2) 18(4.8,-1.5) 19(4.8,-1) 20(4.8,-0.5) 21(4.8,0)
  rect 0.3x0.9 smd: 8(0.9,-3.9) 9(1.4,-3.9) 10(1.9,-3.9) 11(2.4,-3.9) 12(2.9,-3.9) 13(3.4,-3.9) 14(3.9,-3.9) 22(3.9,0.9) 23(3.4,0.9) 24(2.9,0.9) 25(2.4,0.9) 26(1.9,0.9) 27(1.4,0.9) 28(0.9,0.9)
  rect 3.2x3.2 smd: 29(2.4,-1.5)
  silkscreen extent -0.76,-4 4.9,1.01
RAPC722X [mm] "CONN POWERJACK MINI R/A T/H"
  round 4.56 hole 3.56: 1(0,0)
  round 4 hole 3.05: 2(0,-6.25) 3(4.8,-3)
  silkscreen extent -4.5,-13.74 4.5,0
SC-89-6 [mm]
  rect 0.3x0.6 smd: 1(0,0) 2(0.5,0) 3(1,0) 4(1,1.4) 5(0.5,1.4) 6(0,1.4)
  silkscreen extent -0.76,-0.25 1.3,1.3
SO8 [mm] "SOIC, 8-Leads, Body 4.9x3.9mm, Pitch 1.27mm, IPC Medium Density"
  oval 2.2x0.6 smd: 1(-2.4,1.905) 2(-2.4,0.635) 3(-2.4,-0.635) 4(-2.4,-1.905) 5(2.4,-1.905) 6(2.4,-0.635) 7(2.4,0.635) 8(2.4,1.905)
  silkscreen extent -2.52,-2.5 0.9,2.88, body extent -2,-2.5 2,2.5, height 1.75
SOT23-6_L [mm] "SOT23, 6-Leads, Body 2.9x1.6mm, Pitch 0.95mm, Lead Span 2.7mm, IPC High Density"
  rect 0.9x0.65 smd: 1(-1.2,0.95) 2(-1.2,0) 3(-1.2,-0.95) 4(1.2,-0.95) 5(1.2,0) 6(1.2,0.95)
  silkscreen extent -1.32,-1.55 0.35,1.95, body extent -0.9,-1.55 0.9,1.55, height 1.45
SOT-23_N [mm] "SOT23, 3-Leads, Body 2.9x1.3mm, Pitch 0.95mm, Lead Span 2.5mm, IPC Medium Density"
  rect 1.15x0.6 smd: 1(-1.125,0.95) 2(-1.125,-0.95) 3(1.125,0)
  silkscreen extent -1.25,-1.5 0.7,1.92, body extent -0.7,-1.5 0.7,1.5, height 1.1
SOT-753 [mm]
  rect 0.6x1.05 smd: 1(0,0) 2(0.95,0) 3(1.9,0) 4(1.9,2.7) 5(0,2.7)
  silkscreen extent -0.87,-0.36 2.47,2.22
TP [mm]
  round 1.5 hole 0.9: 1(0,0)
  silkscreen extent -1.02,-1.02 1.02,1.02
TSOP-6 [mm]
  rect 0.508x0.9 smd: 1(0,0) 2(1,0) 3(2,0) 4(2,2.325) 5(1,2.325) 6(0,2.325)
  silkscreen extent -1.01,-0.13 2.5,1.98
"USB Mini-B" [mm]
  rect 0.5x2 smd: 1(0,0) 2(0.8,0) 3(1.6,0) 4(2.4,0) 5(3.2,0)
  rect 2.2x2.5 smd: 6(-2.6,-0.25) 7(5.8,-0.25) 8(-2.6,-5.5) 9(5.8,-5.5)
  silkscreen extent -2.25,-8.65 5.45,1.01
VQ100_N [mm] "Thin QFP, 100-Leads, Body 14x14mm, Pitch 0.5mm, IPC Medium Density"
  oval 1.8x0.3 smd: 1(-7.55,6) 2(-7.55,5.5) 3(-7.55,5) 4(-7.55,4.5) 5(-7.55,4) 6(-7.55,3.5) 7(-7.55,3) 8(-7.55,2.5) 9(-7.55,2) 10(-7.55,1.5) 11(-7.55,1) 12(-7.55,0.5) 13(-7.55,0) 14(-7.55,-0.5) 15(-7.55,-1) 16(-7.55,-1.5) 17(-7.55,-2) 18(-7.55,-2.5) 19(-7.55,-3) 20(-7.55,-3.5) 21(-7.55,-4) 22(-7.55,-4.5) 23(-7.55,-5) 24(-7.55,-5.5) 25(-7.55,-6) 51(7.55,-6) 52(7.55,-5.5) 53(7.55,-5) 54(7.55,-4.5) 55(7.55,-4) 56(7.55,-3.5) 57(7.55,-3) 58(7.55,-2.5) 59(7.55,-2) 60(7.55,-1.5) 61(7.55,-1) 62(7.55,-0.5) 63(7.55,0) 64(7.55,0.5) 65(7.55,1) 66(7.55,1.5) 67(7.55,2) 68(7.55,2.5) 69(7.55,3) 70(7.55,3.5) 71(7.55,4) 72(7.55,4.5) 73(7.55,5) 74(7.55,5.5) 75(7.55,6)
  oval 0.3x1.8 smd: 26(-6,-7.55) 27(-5.5,-7.55) 28(-5,-7.55) 29(-4.5,-7.55) 30(-4,-7.55) 31(-3.5,-7.55) 32(-3,-7.55) 33(-2.5,-7.55) 34(-2,-7.55) 35(-1.5,-7.55) 36(-1,-7.55) 37(-0.5,-7.55) 38(0,-7.55) 39(0.5,-7.55) 40(1,-7.55) 41(1.5,-7.55) 42(2,-7.55) 43(2.5,-7.55) 44(3,-7.55) 45(3.5,-7.55) 46(4,-7.55) 47(4.5,-7.55) 48(5,-7.55) 49(5.5,-7.55) 50(6,-7.55) 76(6,7.55) 77(5.5,7.55) 78(5,7.55) 79(4.5,7.55) 80(4,7.55) 81(3.5,7.55) 82(3,7.55) 83(2.5,7.55) 84(2,7.55) 85(1.5,7.55) 86(1,7.55) 87(0.5,7.55) 88(0,7.55) 89(-0.5,7.55) 90(-1,7.55) 91(-1.5,7.55) 92(-2,7.55) 93(-2.5,7.55) 94(-3,7.55) 95(-3.5,7.55) 96(-4,7.55) 97(-4.5,7.55) 98(-5,7.55) 99(-5.5,7.55) 100(-6,7.55)
  silkscreen extent -7.67,-6.25 6.25,6.82, body extent -7,-7 7,7, height 1.2

## Part data
C1 C2 C3 C4 C5 C6 C7 C8 C9 C10 C11 C12 C13 C14 C15 C16 C17 C18 C19 C20 C21 C22 C23 C24 C26 C27 C28 C29 C30 C31 C32 C33 C34 C35 C36 C37 C38 C39 C40 C41 C42 C46 C47 C48 C49 C50 C51 C52 C53 C54 C55 C56 C57 C58 C59 C60 C61: "Capacitor (Semiconductor SIM Model)"
D1: "Schottky Diode"
D2: library part "Diode BAT18", "Low-Loss RF Switching Diode"
DIP1: "4-DIP Switch"
F1: "IGLOO nano Low-Power Flash 1.2 to 1.5V FPGA with Flash*Freeze, 68 User IOs, 250K System Gates, 1Kbit Flash ROM, 100-Pin TQFP, Commercial Grade, Pb-Free"
F2: library part "Fuse MICROSMD050F-2", "POLYSWITCH 0.50A RESET FUSE SMD"
FB1: library part "Ferrite Bead HF30ACC321611-T"
H2: "USB mini-B"
I1: library part "Inductor IHLP-2020BZ-01", "IHLP2020BZER2R2M01"
P1: "Header, 5-Pin, Dual row"
P2 P15: "Header, 4-Pin, Dual row"
P3: "CONN POWERJACK MINI R/A T/H"
P4: "Header, 2-Pin, Dual row"
P5: "Header, 3-Pin, Dual row"
P6: "Header, 24-Pin, Dual row"
P8 P9 P10 P11: "Header, 2-Pin"
P13 P14: "Header, 8-Pin, Dual row"
Q1 Q2: "P-Channel MOSFET"
R1 R2 R3 R4 R5 R6 R7 R8 R10 R11 R17 R18 R19 R20 R21 R22 R23 R24 R25 R26 R27 R28 R29 R30 R31 R32 R33 R34 R35 R36 R37 R38 R39 R40 R41 R42 R43 R44 R45 R46 R47 R48 R49 R50 R51 R52 R53 R54 R55 R56 R59 R60 R61 R62 R63 R64 R65 R66 R67 R68 R69 R70 R71 R72 R73 R74 R75 R76 R77 R78 R79 R80 R81 R82 R83 R84 R85: "Semiconductor Resistor"
S1 S2 S3 S4: "Switch Push"
U10: "USB ESD Protection"
U11 U12 U14 U15: "Complementary N- and P-Channel 20 V (D-S) MOSFET"
U13 U16: "LOW-POWER SINGLE BUS BUFFER GATE WITH 3-STATE OUTPUT"
U17: "I2C Temp Sensor"

## Via types
v1: diameter 40, hole 20, Top Layer to Bottom Layer, 82 vias
v2: diameter 200, hole 120, Top Layer to Bottom Layer, 4 vias
v3: diameter 30, hole 20, Top Layer to Bottom Layer, 2 vias

## Nets (pads, with @x,y where several pads share a name; then routed paths per layer and width w, separated by ;. In a path a pad name is that pad's centre, name@x,y a point inside that pad or via, vN(x,y) a via of type N, cw(c..) or ccw(c..) an arc to the next point about the centre after c; other vN are vias at no path point)
ALT_I2C_SCL: F1.76 P13.15 R77.2 U17.2 | length 2123.3
  Top Layer w10: P13.15@1595,4005 P13.15@1600,4000 1795,3805 1795,3225 2263.78,2756.22 F1.76@2352.76,2756.22
  Bottom Layer w10: P13.15@1600,4000 1767.56,4000 R77.2@1875,3892.56 1912.44,3892.56 1930,3875 1985,3875 2000,3860 U17.2@2000,3809.49
ALT_I2C_SDA: F1.77 P13.13 R78.2 U17.1 | length 1902.4
  Top Layer w10: P13.13@1600,3900 1775,3725 1775,3220 2258.46,2736.54 F1.77@2352.76,2736.54
  Bottom Layer w7: R78.2@1807.56,3900 R78.2@1815,3892.56 1843.87,3863.69 1918.85,3863.69 U17.1@1945.75,3836.79
  Bottom Layer w10: P13.13@1600,3900 R78.2@1807.56,3900
DISCRETE_SCL: P7.6 U12.6 U13.2 | length 2024.7
  Bottom Layer w7: U13.2@3217.4,1825 3217.4,1857.6 3200,1875 U12.6@3200,1889.88 3139.5,1950.38 3139.5,3088.63 3058,3170.13 3058,3498 3115,3555 3260,3555 P7.6@3302.5,3597.5
DISCRETE_SCL_BUF: F1.8 TP34.1 U13.4 | length 1344.2
  Top Layer w10: F1.8@2551.57,2222.76 2551.57,1953.43 2660,1845 2895,1845 2960,1780 3350,1780 TP34.1@3400,1730
  Bottom Layer w10: U13.4@3254.8,1718.7 TP34.1@3388.7,1718.7
DISCRETE_SDA: P7.3 U15.6 U16.2 | length 2505.9
  Bottom Layer w7: U15.6@2785,1889.88 2785,1875 2802.4,1857.6 ; U16.2@2802.4,1825 2802.4,1857.6 ; P7.3@3302.5,3697.5 3255,3650 3085,3650 3042,3607 3042,3138 3120,3060 3120,1905 2995,1780 2945,1780 2867.4,1857.6 2802.4,1857.6
DISCRETE_SDA_BUF: F1.7 TP35.1 U16.4 | length 952
  Top Layer w10: F1.7@2531.89,2222.76 2531.89,1948.11 2655,1825 2890,1825 TP35.1@2985,1730
  Bottom Layer w10: U16.4@2839.8,1718.7 TP35.1@2973.7,1718.7
FPGA_IO_0: F1.63 P6.1 | length 545.3
  Top Layer w10: P6.1@2300,3200 2330,3200 2650,2880 F1.63@2650,2817.24
FPGA_IO_1: F1.62 P6.3 | length 493
  Top Layer w10: P6.3@2397.5,3197.5 2669.68,2925.32 F1.62@2669.68,2817.24
FPGA_IO_2: F1.61 P6.5 | length 459.7
  Top Layer w10: P6.5@2497.5,3197.5 2689.37,3005.63 F1.61@2689.37,2817.24
FPGA_IO_3: F1.60 P6.7 | length 427.9
  Top Layer w10: P6.7@2600,3200 2709.06,3090.94 F1.60@2709.06,2817.24
FPGA_IO_4: F1.59 P6.9 | length 394.7
  Top Layer w10: P6.9@2700,3200 2728.74,3171.26 F1.59@2728.74,2817.24
FPGA_IO_5: F1.58 P6.11 | length 404.1
  Top Layer w10: F1.58@2748.43,2817.24 2748.43,3148.43 P6.11@2800,3200
FPGA_IO_6: F1.57 P6.13 | length 437.4
  Top Layer w10: F1.57@2768.11,2817.24 2768.11,3068.11 P6.13@2900,3200
FPGA_IO_7: F1.45 P6.15 | length 826.6
  Top Layer w10: F1.45@2949.02,2659.57 3014.57,2659.57 3210,2855 3210,3080 3185,3105 3095,3105 P6.15@3000,3200
FPGA_IO_8: F1.44 P6.17 | length 761.9
  Top Layer w10: F1.44@2947.24,2638.11 3018.11,2638.11 3230,2850 3230,3085 3130,3185 P6.17@3115,3185
FPGA_IO_9: F1.43 P6.19 | length 772.3
  Top Layer w10: F1.43@2947.24,2618.43 3023.43,2618.43 3250,2845 3250,3150 P6.19@3200,3200
FPGA_IO_10: F1.42 P6.21 | length 795.1
  Top Layer w10: F1.42@2947.24,2598.74 3028.74,2598.74 3300,2870 P6.21@3300,3200
FPGA_IO_11: F1.41 P6.23 | length 859.3
  Top Layer w10: F1.41@2947.24,2579.06 3034.06,2579.06 3400,2945 P6.23@3400,3200
FPGA_IO_12: F1.40 P6.25 | length 923.6
  Top Layer w10: F1.40@2947.24,2559.37 3039.37,2559.37 3500,3020 P6.25@3500,3200
FPGA_IO_13: F1.36 P6.27 | length 1013.4
  Top Layer w10: F1.36@2947.24,2480.63 2987.55,2480.63 3600,3093.08 P6.27@3600,3200
FPGA_IO_14: F1.35 P6.29 | length 1077
  Top Layer w10: F1.35@2947.24,2460.94 2991.9,2460.94 3700,3169.04 P6.29@3700,3200
FPGA_IO_15: F1.34 P6.31 | length 1167
  Top Layer w10: F1.34@2947.24,2441.26 2996.26,2441.26 3715,3160 3760,3160 P6.31@3800,3200
FPGA_IO_16: F1.33 P6.33 | length 1275.2
  Top Layer w10: F1.33@2947.24,2421.57 3001.57,2421.57 3720,3140 3840,3140 P6.33@3900,3200
FPGA_IO_17: F1.32 P6.35 | length 1383.3
  Top Layer w10: F1.32@2947.24,2401.89 3006.89,2401.89 3725,3120 3920,3120 P6.35@4000,3200
FPGA_IO_18: F1.31 P6.37 | length 1503.6
  Top Layer w10: F1.31@2947.24,2382.2 3012.2,2382.2 3730,3100 4005,3100 P6.37@4110,3205
FPGA_IO_19: F1.30 P6.39 | length 1603.2
  Top Layer w10: F1.30@2947.24,2362.52 3017.52,2362.52 3735,3080 4080,3080 P6.39@4202.5,3202.5
FPGA_IO_20: F1.29 P6.41 | length 1707.8
  Top Layer w10: F1.29@2947.24,2342.83 3022.83,2342.83 3740,3060 4160,3060 P6.41@4300,3200
FPGA_IO_21: F1.28 P6.43 | length 1816
  Top Layer w10: F1.28@2947.24,2323.15 3028.15,2323.15 3745,3040 4240,3040 P6.43@4400,3200
FPGA_IO_22: F1.27 P6.45 | length 1924.1
  Top Layer w10: F1.27@2947.24,2303.46 3033.46,2303.46 3750,3020 4320,3020 P6.45@4500,3200
FPGA_IO_23: F1.26 P6.47 | length 2032.3
  Top Layer w10: F1.26@2947.24,2283.78 3038.78,2283.78 3755,3000 4400,3000 P6.47@4600,3200
FPGA_PINT_CLK: F1.69 R81.1 | length 897
  Top Layer w10: R81.1@2165,3512.44 2211,3466.44 2211,3139 2350,3000 2435,3000 2531.89,2903.11 F1.69@2531.89,2817.24
FPGA_PINT_RDDATA: F1.71 R83.1 | length 928.9
  Top Layer w10: R83.1@2055,3512.44 2059.56,3512.44 2177,3395.01 2177,3123 2340,2960 2425,2960 2492.52,2892.48 F1.71@2492.52,2817.24
FPGA_PINT_RDRDY: F1.70 R82.1 | length 911.6
  Top Layer w10: R82.1@2110,3512.44 2194,3428.44 2194,3131 2345,2980 2430,2980 2512.2,2897.8 F1.70@2512.2,2817.24
FPGA_PINT_RDREQ: F1.72 R84.1 | length 944.9
  Top Layer w10: R84.1@2000,3512.44 2047.44,3465 2060,3465 2160,3365 2160,3115 2335,2940 2414.3,2940 2472.83,2881.46 F1.72@2472.83,2817.24
FPGA_PINT_RESETN: F1.73 R85.1 | length 977.6
  Top Layer w10: R85.1@1945,3512.44 2012.44,3445 2055,3445 2143,3357 2143,3107 2328,2922 2408.25,2922 2453.15,2877.11 F1.73@2453.15,2817.24
FPGA_PINT_WRDATA: F1.65 R80.1 | length 908.6
  Top Layer w10: R80.1@2220,3512.44 2230,3502.44 2230,3145 2355,3020 2443.04,3020 2610.63,2852.41 F1.65@2610.63,2817.24
FPGA_PINT_WRREQ: F1.64 R79.1 | length 914.1
  Top Layer w10: R79.1@2275,3512.44 2250,3487.44 2250,3150 2360,3040 2447.08,3040 2630.32,2856.77 F1.64@2630.32,2817.24
FPGA_SPI_CLKOUT: F1.22 P15.3 | length 2488.4
  Top Layer w10: F1.22@2827.17,2222.76 2827.17,2157.83 2850,2135 2940,2135 3765,2960 4560,2960 P15.3@4800,3200
FPGA_SPI_FSSOUT: F1.21 P15.5 | length 2627.7
  Top Layer w10: F1.21@2807.48,2222.76 2807.48,2152.52 2845,2115 2945,2115 3770,2940 4640,2940 P15.5@4900,3200
FPGA_SPI_RXD: F1.20 P15.7 | length 2768.6
  Top Layer w10: F1.20@2787.8,2222.76 2787.8,2147.2 2840,2095 2950,2095 3775,2920 4725,2920 P15.7@5002.5,3197.5
FPGA_SPI_TXD: F1.23 P15.1 | length 2349
  Top Layer w10: F1.23@2846.85,2222.76 2846.85,2163.15 2855,2155 2935,2155 3760,2980 4480,2980 P15.1@4700,3200
GND: C1.1 C2.1 C3.1 C4.1 C5.1 C6.1 C7.1 C8.1 C9.1 C10.1 C11.1 C12.1 C13.1 C14.1 C15.1 C16.1 C17.1 C18.1 C19.1 C20.1 C21.1 C22.1 C23.1 C24.1 C26.1 C27.1 C28.2 C30.1 C33.1 C34.1 C35.1 C36.1 C37.1 C38.1 C39.1 C40.1 C41.1 C42.1 C46.1 C47.1 C50.1 C51.1 C52.1 C53.1 C54.1 C55.1 C56.1 C57.1 C58.1 C59.1 C60.1 C61.1 D2.1 DIP1.5 DIP1.6 DIP1.7 DIP1.8 F1.1 F1.9 F1.12 F1.25 F1.38 F1.46 F1.51 F1.67 F1.75 F1.88 F1.99 H2.5 H2.6 H2.7 H2.8 H2.9 P1.2 P1.10 P3.2 P3.3 R1.1 R2.1 R3.1 R4.1 R5.1 R6.1 R7.1 R8.1 R10.2 R11.2 R47.2 R48.1 R50.1 R51.1 R52.1 R53.1 R54.1 R55.1 R56.1 R63.1 R64.1 S1.2 S2.2 S3.2 S4.2 TP20.1 TP21.1 TP23.1 TP24.1 TP25.1 U1.C5 U1.F2 U2.B5 U2.J6 U3.3 U3.5 U3.6 U3.15 U4.2 U9.3 U9.29 U10.2 U11.1 U13.3 U14.1 U16.3 U17.4 U17.5 U17.6 U17.7 X1.2 | length 9829.6
  Top Layer w10: v1(1015,1225) H2.9@1056.81,1225 ; R8.1@1047.44,3965 R7.1@1047.44,3875 R6.1@1047.44,3785 R5.1@1047.44,3695 R4.1@1047.44,3605 R3.1@1047.44,3515 R2.1@1047.44,3425 R1.1@1047.44,3335 1047.44,3212.56 DIP1.5@1070,3190 ; v1(1050,1660) 1117.64,1592.36 H2.6@1330.16,1592.36 ; H2.9@1116.65,1261.65 1330.16,1261.65 1340,1271.5 H2.5@1340,1364.02 ; v1(1482.56,1412.56) U10.2@1532.76,1412.56 ; U9.3@1710,1390.63 U9.29@1784.8,1390.63 ; R64.1@1725,1897.56 1759.84,1932.4 D2.1@1855.71,1932.4 ; C53.1@2000,1785.12 C53.1@2010.12,1785.12 ; R50.1@2015,1587.44 2015,1478.94 P3.2@2200,1293.94 ; v1(2035,1965) C1.1@2035,2062.44 2035,2044.88 2079.88,2000 2137.68,2000 X1.2@2192.68,2055 ; U4.2@2102.76,1745 2120,1745 2150,1715 v1(2150,1665) ; v1(2335,2835) 2352.76,2817.24 F1.75@2413.78,2817.24 ; F1.99@2352.76,2303.46 2428.46,2303.46 2413.78,2288.78 F1.1@2413.78,2222.76 ; F1.88@2352.76,2520 2415,2520 v1(2430,2535) ; v1(2570,2665) 2571.26,2666.26 F1.67@2571.26,2817.24 ; F1.9@2571.26,2222.76 2571.26,2271.26 2605,2305 v1(2630,2305) 2630.32,2304.68 F1.12@2630.32,2222.76 ; v1(2670,1715) 2682.56,1702.44 C28.2@2682.56,1680 ; U3.3@2714.37,1400 U3.15@2714.37,1443.31 ; U3.5@2753.74,1400 2753.74,1443.31 2773.43,1423.62 U3.6@2773.43,1400 ; C33.1@2787.56,1625 C27.1@2787.56,1680 2787.56,1741.06 C26.1@2791.5,1745 2836.5,1790 v1(2860,1790) ; v1(2795,2520) F1.38@2947.24,2520 ; v1(2870,2305) 2886.22,2288.78 F1.25@2886.22,2222.76 ; v1(2875,2675) 2877.48,2677.48 F1.46@2947.24,2677.48 ; F1.51@2886.22,2817.24 2886.22,2846.22 2915,2875 v1(2940,2875)
  Top Layer w20: C50.1@1602.56,1292.56 v1(1637.44,1292.56) ; R63.1@1615,1785.12 C51.1@1560,1785.12 1560,1825 1632.56,1897.56 C52.1@1670,1897.56 R64.1@1725,1897.56 ; C47.1@1890,1785.12 C46.1@1945,1785.12 C53.1@2000,1785.12 ; C53.1@2010.12,1785.12 v1(2040,1815) ; P3.3@2388.98,1421.89 2409.45,1421.89 R47.2@2500,1512.44 ; P3.3@2405.87,1405 R48.1@2557.44,1405 ; U3.15@2734.06,1462.99 2807.01,1462.99 2845,1425 C30.1@2903.5,1425 v3(2903.5,1331.5) ; v1(3190,1615) C37.1@3222.44,1615 ; C39.1@3227.56,1238.94 R54.1@3227.56,1405 ; C39.1@3231.5,1235 v1(3265,1201.5) ; v1(3455,1615) C40.1@3487.44,1615 ; R56.1@3496.5,1401.06 C42.1@3496.5,1235 v1(3530,1201.5) ; v1(3720,1615) C34.1@3752.44,1615 ; R53.1@3757.56,1405 3757.56,1238.94 v1(3795,1201.5)
  Bottom Layer w10: v1(1482.56,1412.56) v1@1487.56,1412.56 ; v1(1855,3520) C61.1@1882.44,3520 ; C61.1@1895,3507.44 1942.44,3507.44 2000,3565 ; U17.7@2000,3620.51 2000,3565 ; U17.6@2050,3620.51 2050,3565 ; U17.4@2100,3809.49 U17.5@2100,3620.51 2100,3570 2095,3565 2050,3565 ; v1(2335,2835) C10.1@2387.44,2835 ; C6.1@2342.44,2475 2377.44,2510 2405,2510 v1(2430,2535) ; C8.1@2360,2277.56 2402.56,2277.56 v1(2430,2305) ; C5.1@2547.56,2705 v1@2570,2682.56 ; v1(2570,2665) v1@2570,2682.56 ; C2.1@2590,2276.5 2601.5,2276.5 v1(2630,2305) ; C9.1@2592.44,2705 v1@2570,2682.56 ; v1(2625,2045) 2625,2077.44 C15.1@2655,2107.44 ; v1(2670,1715) 2670,1752.56 C57.1@2715,1797.56 ; C3.1@2710,2272.56 2710,2275 v1(2740,2305) 2765,2280 C13.1@2765,2272.56 ; C20.1@2717.44,2875 v1@2797.44,2955 ; v1(2795,2520) v1@2812.56,2520 ; v1(2805,2955) 2837.56,2987.56 C19.1@2915,2987.56 ; v1@2812.56,2955 C18.1@2892.56,2875 ; U14.1@2825,1995 2870,2040 v1(2910,2040) ; C56.1@2832.56,2110 3010,2110 v1@3080,2180 ; C4.1@2835,2497.56 v1@2812.56,2520 ; C11.1@2835,2542.44 v1@2812.56,2520 ; U16.3@2839.8,1825 2839.8,1810.2 v1(2860,1790) ; v1(2875,2675) 2875,2717.56 C12.1@2897.44,2740 ; v1(2940,2875) 2942.44,2877.44 C17.1@2995,2877.44 ; C55.1@3130,1797.56 3050,1717.56 3050,1650 3085,1615 v1(3190,1615) 3220,1645 3220,1760 3254.8,1794.8 U13.3@3254.8,1825 ; U11.1@3240,1995 3285,2040 v1(3325,2040) ; C54.1@3247.56,2110 3247.56,2132.56 v1(3295,2180) ; C22.1@4337.44,4490 4337.44,4492.56 v1(4305,4525) 4307.44,4525 C24.1@4337.44,4555 ; C21.1@4487.44,4490 4487.44,4492.56 v1(4455,4525) 4457.44,4525 C23.1@4487.44,4555 ; R10.2@4500,2192.44 4677.44,2015 4835,2015 P1.10@4905,2085 ; R11.2@4500,2537.56 4500,2705 4595,2800 TP23.1@4610,2800 ; 2000,3565 2050,3565
  other v1: 1775,1340 1835,1340 1775,1400 1835,1400 1596.28,1861.28 3085,2175 2605,4190 2275,4420 2635,4420
  other v2: 5000,1100
M3_VCC_0P6: C22.2 P2.4 P4.4 U1.B5 U1.E2 | length 1462.3
  Top Layer w10: P4.4@3190,4700 3545,4700 3710,4865 4385,4865 4410,4840 4410,4765 U1.E2@4365,4720
  Bottom Layer w7: U1.B5@4640,4420 U1.B5@4665,4420
M3_VCC_1P2: C23.2 P2.6 P4.2 U1.A5 U1.D1 | length 2079.4
  Top Layer w10: P4.2@3190,4800 3620.96,4800 3702.96,4882 4392.04,4882 4454.04,4820 U1.D1@4465,4820
  Bottom Layer w10: U1.D1@4465,4820 4515,4770 4515,4582.56 C23.2@4542.56,4555 4557.56,4570 4805,4570 4820,4555 4820,4475 U1.A5@4765,4420
M3_VCC_BAT: C24.2 P2.8 U1.A6 U1.D2 U1.E3 | length 741.8
  Bottom Layer w7: C24.2@4392.56,4555 4420,4527.56 4420,4500 4459,4461 4689,4461 4715,4435 4715,4370 U1.A6@4765,4320
  Bottom Layer w10: C24.2@4392.56,4555 4392.56,4592.44 U1.E3@4365,4620 U1.D2@4465,4720
M3_VCC_SOL: C21.2 P2.2 U1.A4 U1.G3 | length 3714.1
  Top Layer w20: U1.G3@4165,4612.67 4307.67,4470 4715,4470 U1.A4@4765,4520
  Top Layer w40: P2.2@4000,2800 4070,2870 4905,2870 5080,3045 5080,4205 U1.A4@4765,4520
  Bottom Layer w7: C21.2@4542.56,4490 4557.56,4475 4720,4475 U1.A4@4765,4520
NetC28_1: C28.1 R43.1 U3.12 | length 196.8
  Top Layer w10: C28.1@2627.44,1680 2627.44,1627.56 2660,1595 2671.6,1595 2714.37,1552.23 U3.12@2714.37,1525.98
NetC29_1: C29.1 C31.1 C32.1 R44.1 R47.1 U3.13 | length 350.3
  Top Layer w10: R47.1@2500,1567.56 C32.1@2555,1567.56 C31.1@2604.88,1567.56 ; C29.1@2500,1617.44 R44.1@2555,1617.44 C31.1@2604.88,1567.56 ; U3.13@2694.68,1525.98 2694.68,1547.88 2675,1567.56 C31.1@2610,1567.56 C31.1@2604.88,1567.56
NetC29_2: C29.2 P8.1 R44.2 U3.8 U3.9 | length 710.4
  Top Layer w10: C29.2@2500,1672.56 v3@2525,1697.56 ; v3@2527.56,1700 R44.2@2555,1672.56 ; U3.9@2773.43,1525.98 2773.43,1558.42 2780,1565 ; U3.8@2793.11,1525.98 2793.11,1563.11
  Top Layer w20: 2780,1565 2840,1565 P8.1@2885,1520
  Bottom Layer w10: v3(2530,1700) 2535,1705 2550,1705 2630,1625 2780,1625 P8.1@2885,1520
NetC31_2: C31.2 R45.2 U3.14 | length 120.5
  Top Layer w10: C31.2@2610,1512.44 2623.54,1525.98 U3.14@2675,1525.98 ; R45.2@2612.56,1460 C31.2@2612.56,1509.88
NetC32_2: C32.2 R45.1 | length 50
  Top Layer w10: R45.1@2555,1462.44 C32.2@2555,1512.44
NetC48_1: C48.1 C49.2 D2.3 R59.1 R64.2 | length 355.4
  Top Layer w10: R59.1@1780,1785.12 C48.1@1725,1785.12 R64.2@1725,1842.44 1780,1897.44 1782.44,1895 D2.3@1944.29,1895
NetC48_2: C48.2 C51.2 F2.2 Q2.4 R61.2 R63.2 | length 424.6
  Top Layer w20: C51.2@1560,1730 R63.2@1615,1730 1645,1730 ; C48.2@1725,1730 R61.2@1670,1730 1645,1730 ; Q2.4@1743.46,1626.3 1716.3,1626.3 1682.56,1592.56 F2.2@1638.15,1592.56 1645,1599.41 1645,1730
NetC49_1: C49.1 R60.1 | length 77.8
  Top Layer w10: C49.1@1780,1842.44 R60.1@1835,1787.44
NetC52_2: C52.2 R61.1 | length 57.3
  Top Layer w10: R61.1@1670,1785.12 C52.2@1670,1842.44
NetC58_2: C58.2 P5.5 U2.A5 U2.J5
NetC59_2: C59.2 P5.3 U2.D9
NetC60_2: C60.2 P5.1 U2.D10 U2.K6 | length 37.6
  Bottom Layer w10: v1@2722.56,4382.44 C60.2@2722.56,4420
  other v1: 2725,4380
NetDIP1_1: DIP1.1 P14.10 R69.2 | length 610
  Top Layer w10: DIP1.1@1370,2890 1465,2795 1465,2650 P14.10@1610,2505
  Bottom Layer w10: DIP1.1@1370,2890 1382.44,2890 R69.2@1462.44,2970
NetDIP1_2: DIP1.2 P14.12 R70.2 | length 591.3
  Top Layer w10: DIP1.2@1370,2990 1485,2875 1485,2730 P14.12@1610,2605
  Bottom Layer w10: DIP1.2@1370,2990 1405,3025 R70.2@1462.44,3025
NetDIP1_3: DIP1.3 P14.14 R71.2 | length 581
  Top Layer w10: DIP1.3@1370,3090 1505,2955 1505,2810 P14.14@1610,2705
  Bottom Layer w10: DIP1.3@1370,3090 1380,3080 R71.2@1462.44,3080
NetDIP1_4: DIP1.4 P14.16 R72.2 | length 599.6
  Top Layer w10: DIP1.4@1370,3190 1610,2950 P14.16@1610,2805
  Bottom Layer w10: DIP1.4@1370,3190 1425,3135 R72.2@1462.44,3135
NetF1_78: F1.78 P13.11 | length 1446.2
  Top Layer w10: P13.11@1605,3795 1755,3645 1755,3215 2253.15,2716.85 F1.78@2352.76,2716.85